# Altium PCB T19CAN20180910.PCBDoc
Units mm, origin at the board's own origin, x right, y up, seen from the top; angles counter-clockwise.
Board outline 92.61 x 66.21 mm, 18 copper layers (TopLayer, InternalPlane1, InternalPlane2, InternalPlane3, InternalPlane4, InternalPlane5, InternalPlane6, InternalPlane7, InternalPlane8, InternalPlane9, InternalPlane10, InternalPlane11, InternalPlane12, InternalPlane13, InternalPlane14, InternalPlane15, InternalPlane16, BottomLayer); 48 components, 496 nets, 294 pads, 40 vias.
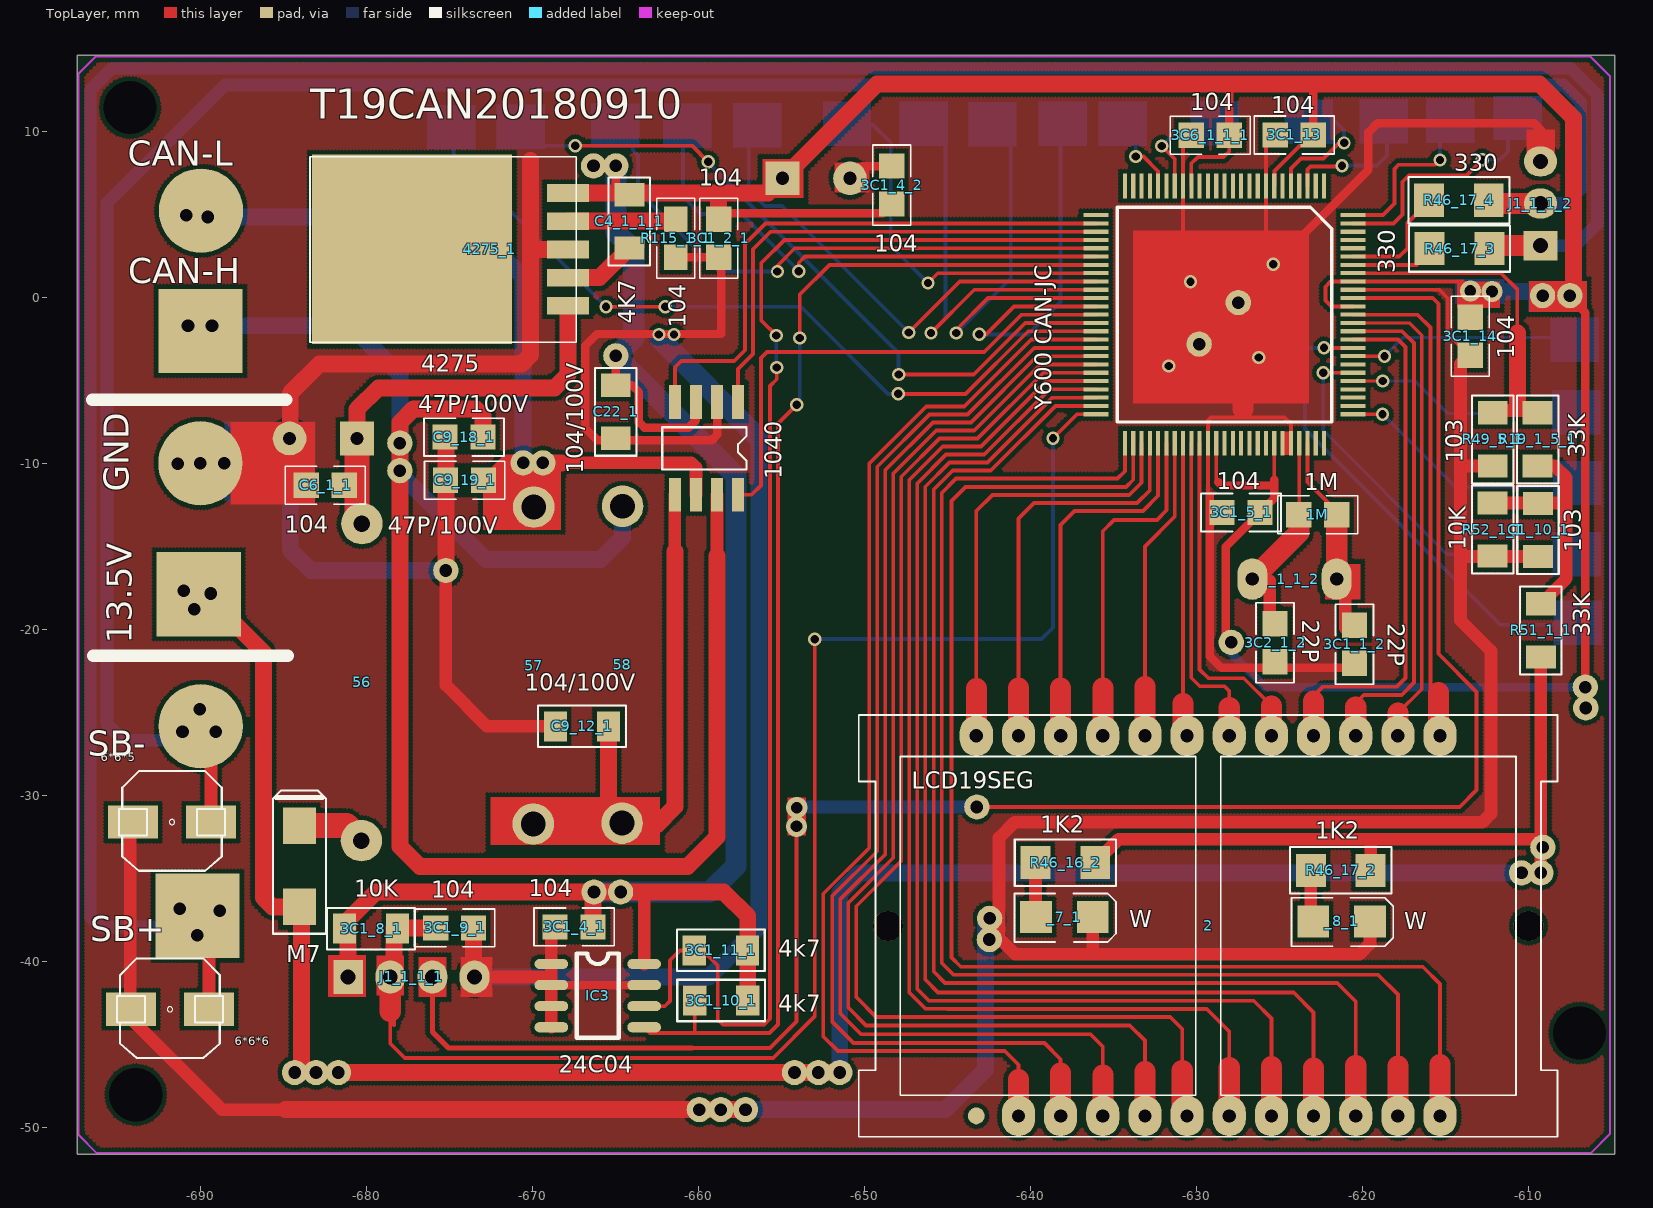
[diagram p0: TopLayer view]
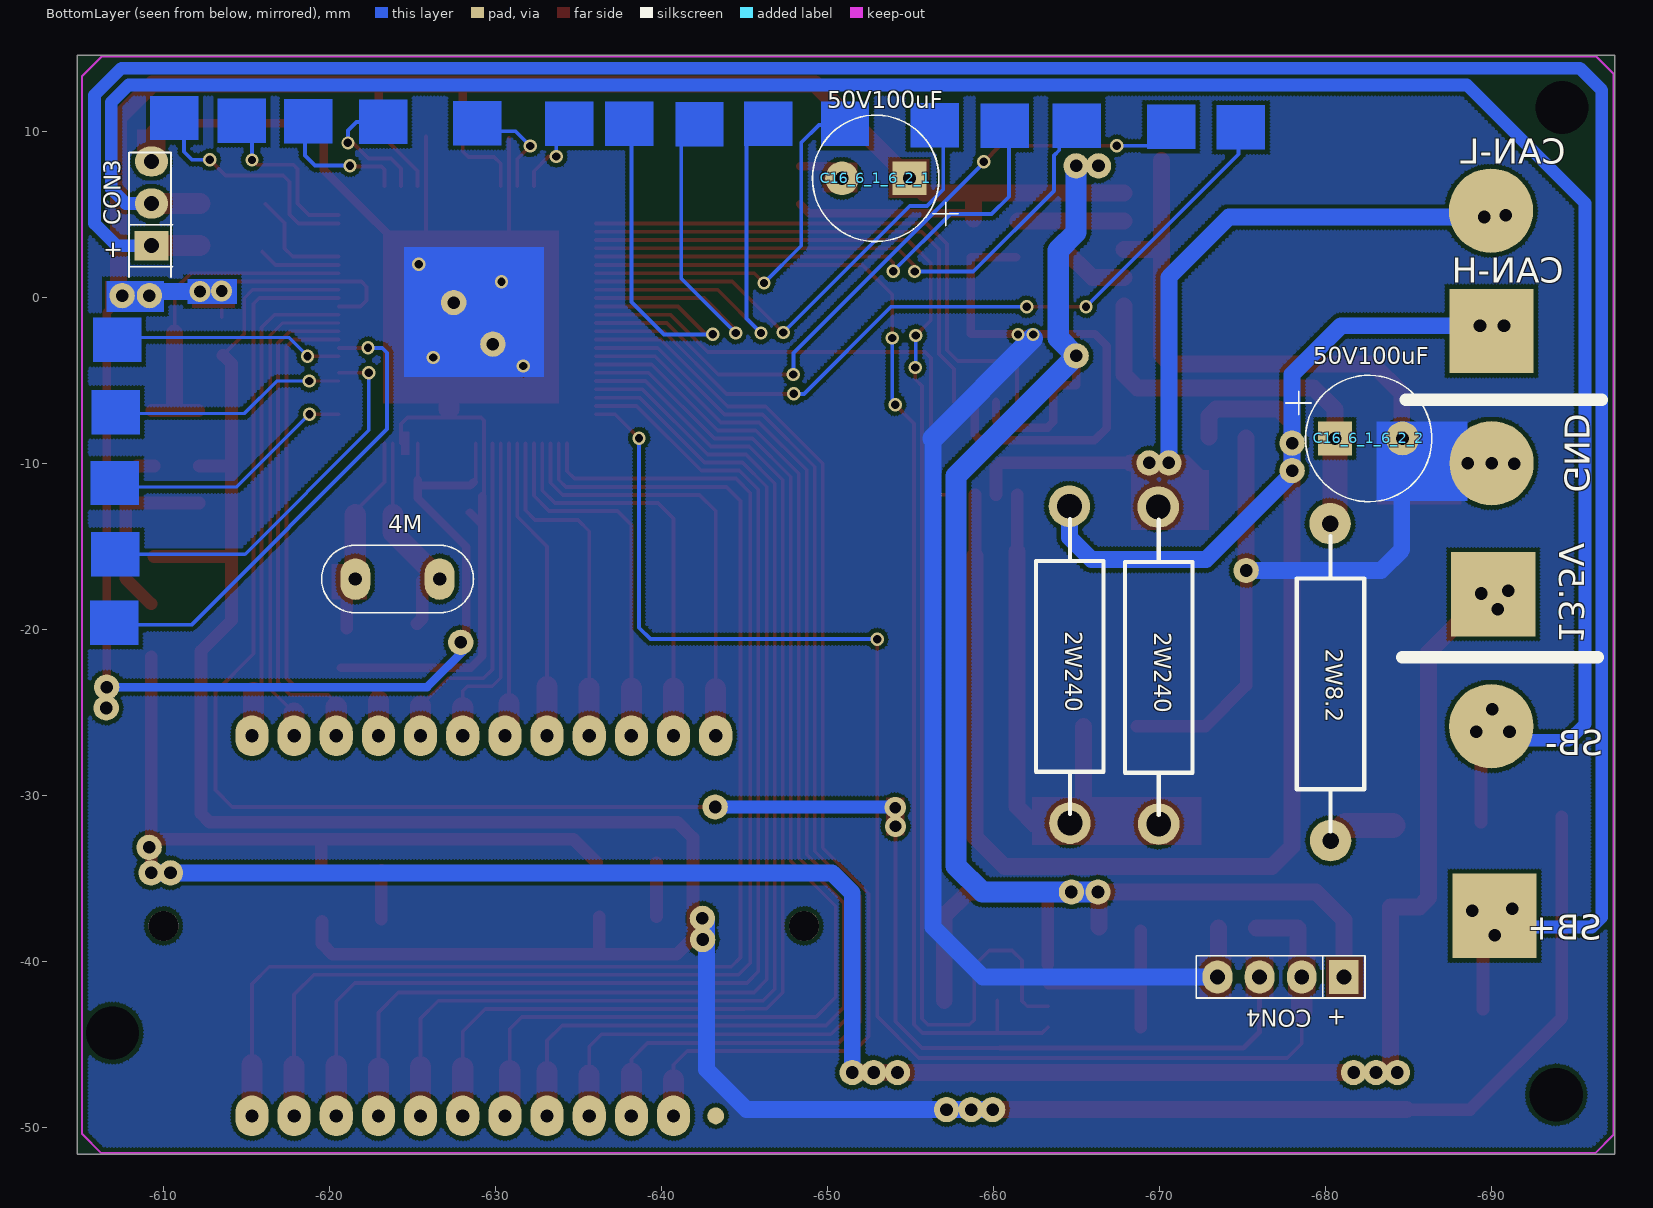
[diagram p1: BottomLayer view, seen from below]
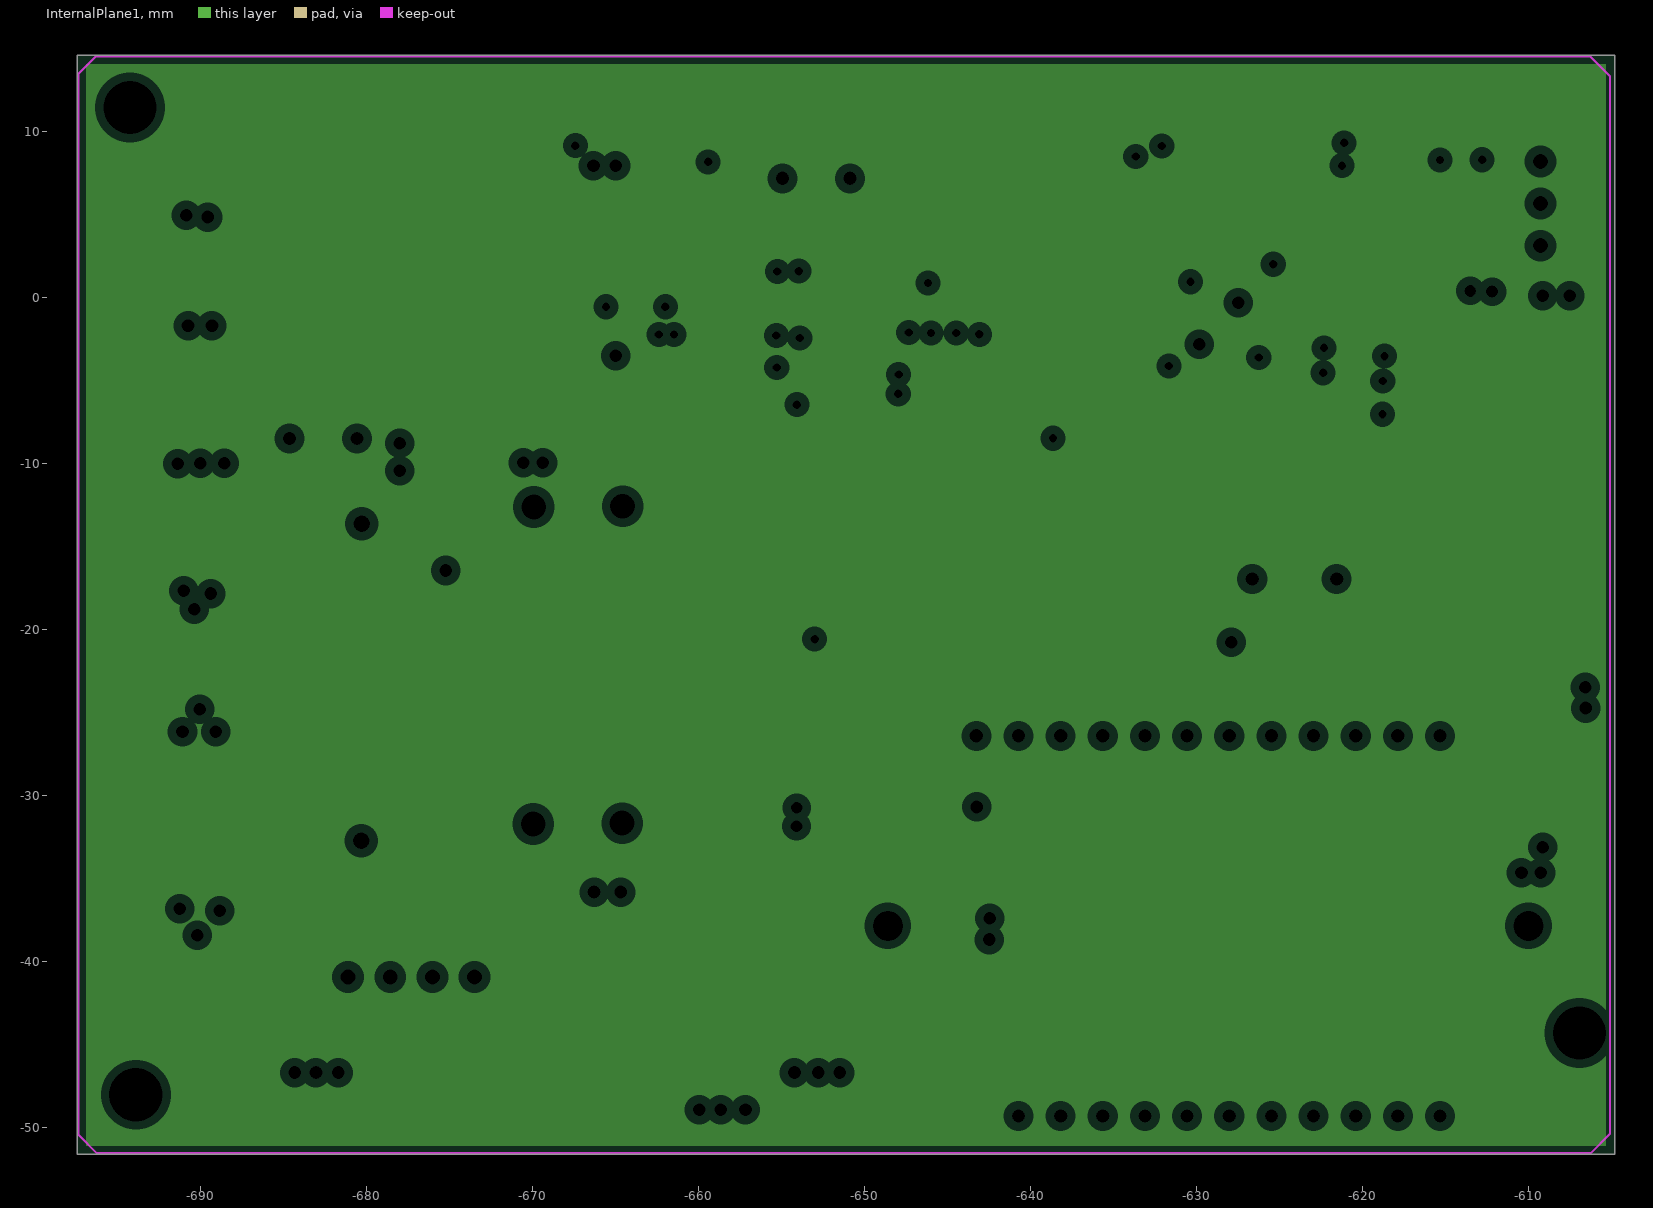
[diagram p2: InternalPlane1, clearances drawn from the general rule]
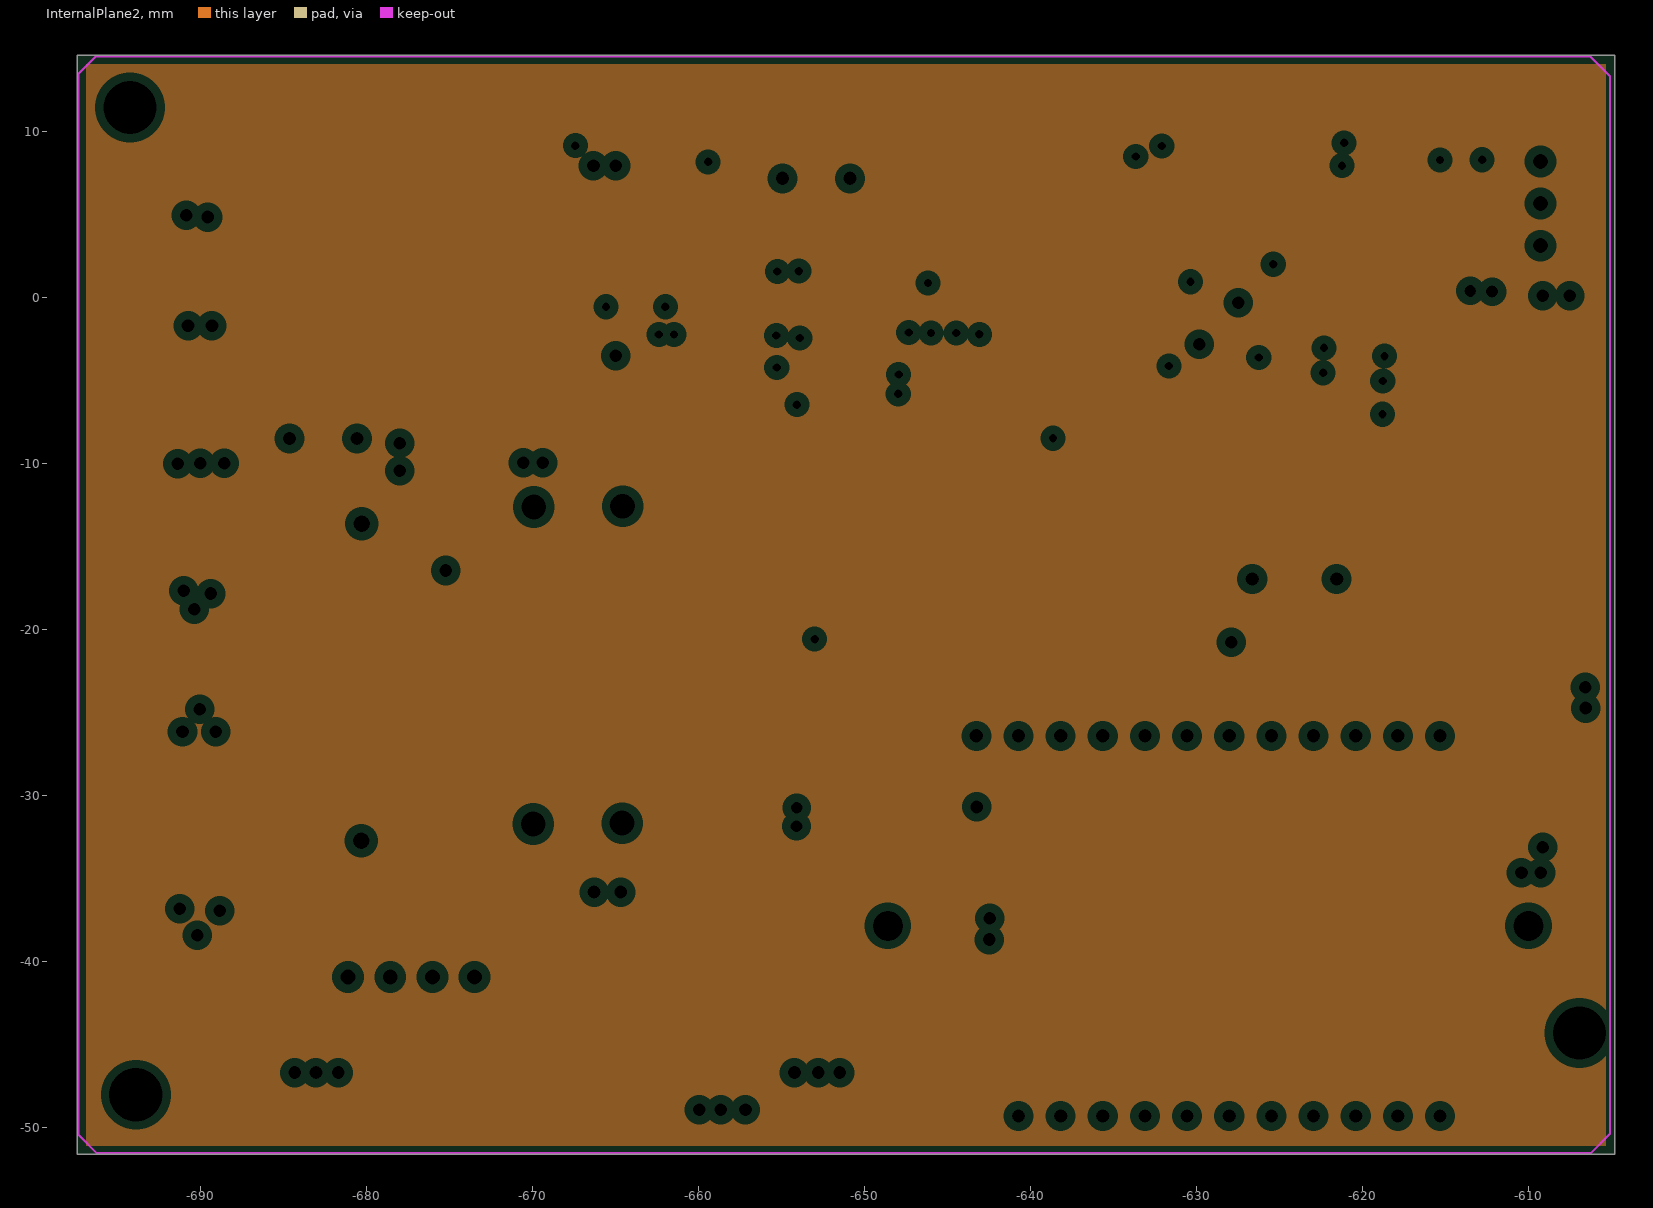
[diagram p3: InternalPlane2, clearances drawn from the general rule]
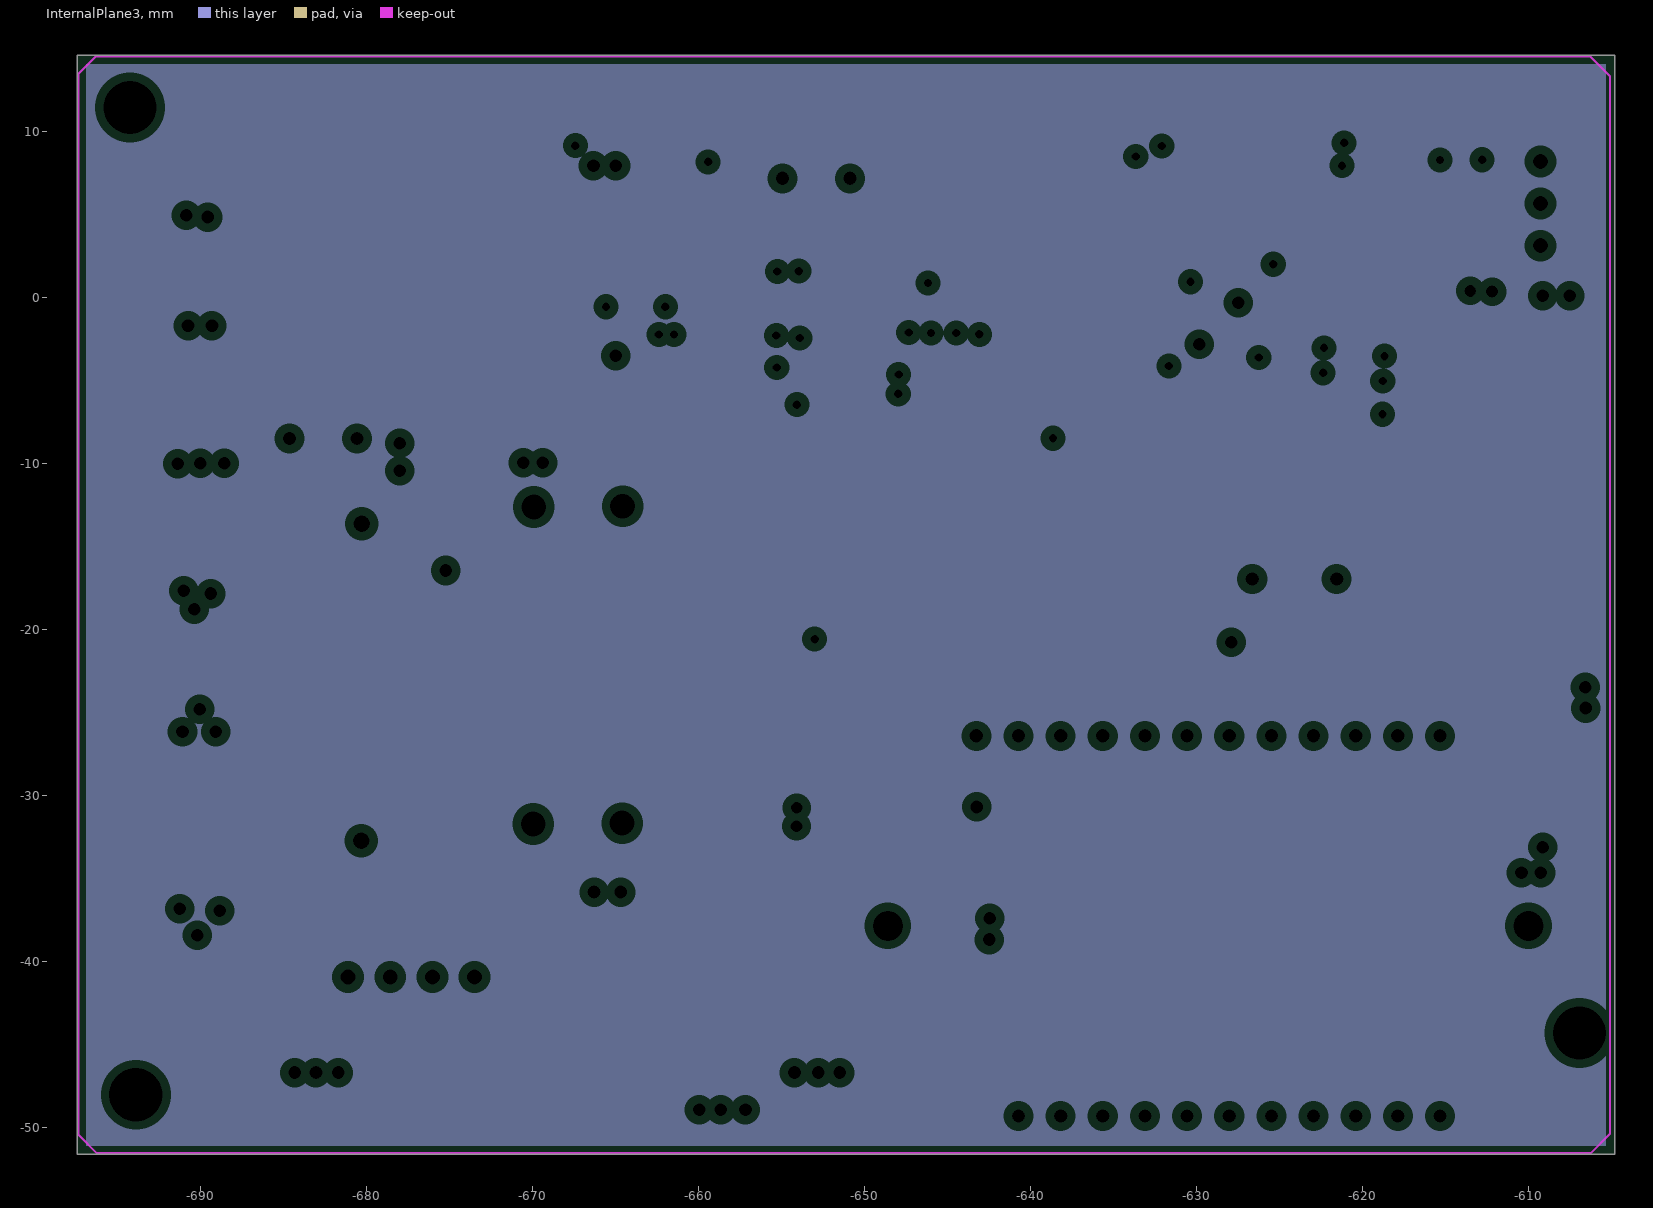
[diagram p4: InternalPlane3, clearances drawn from the general rule]
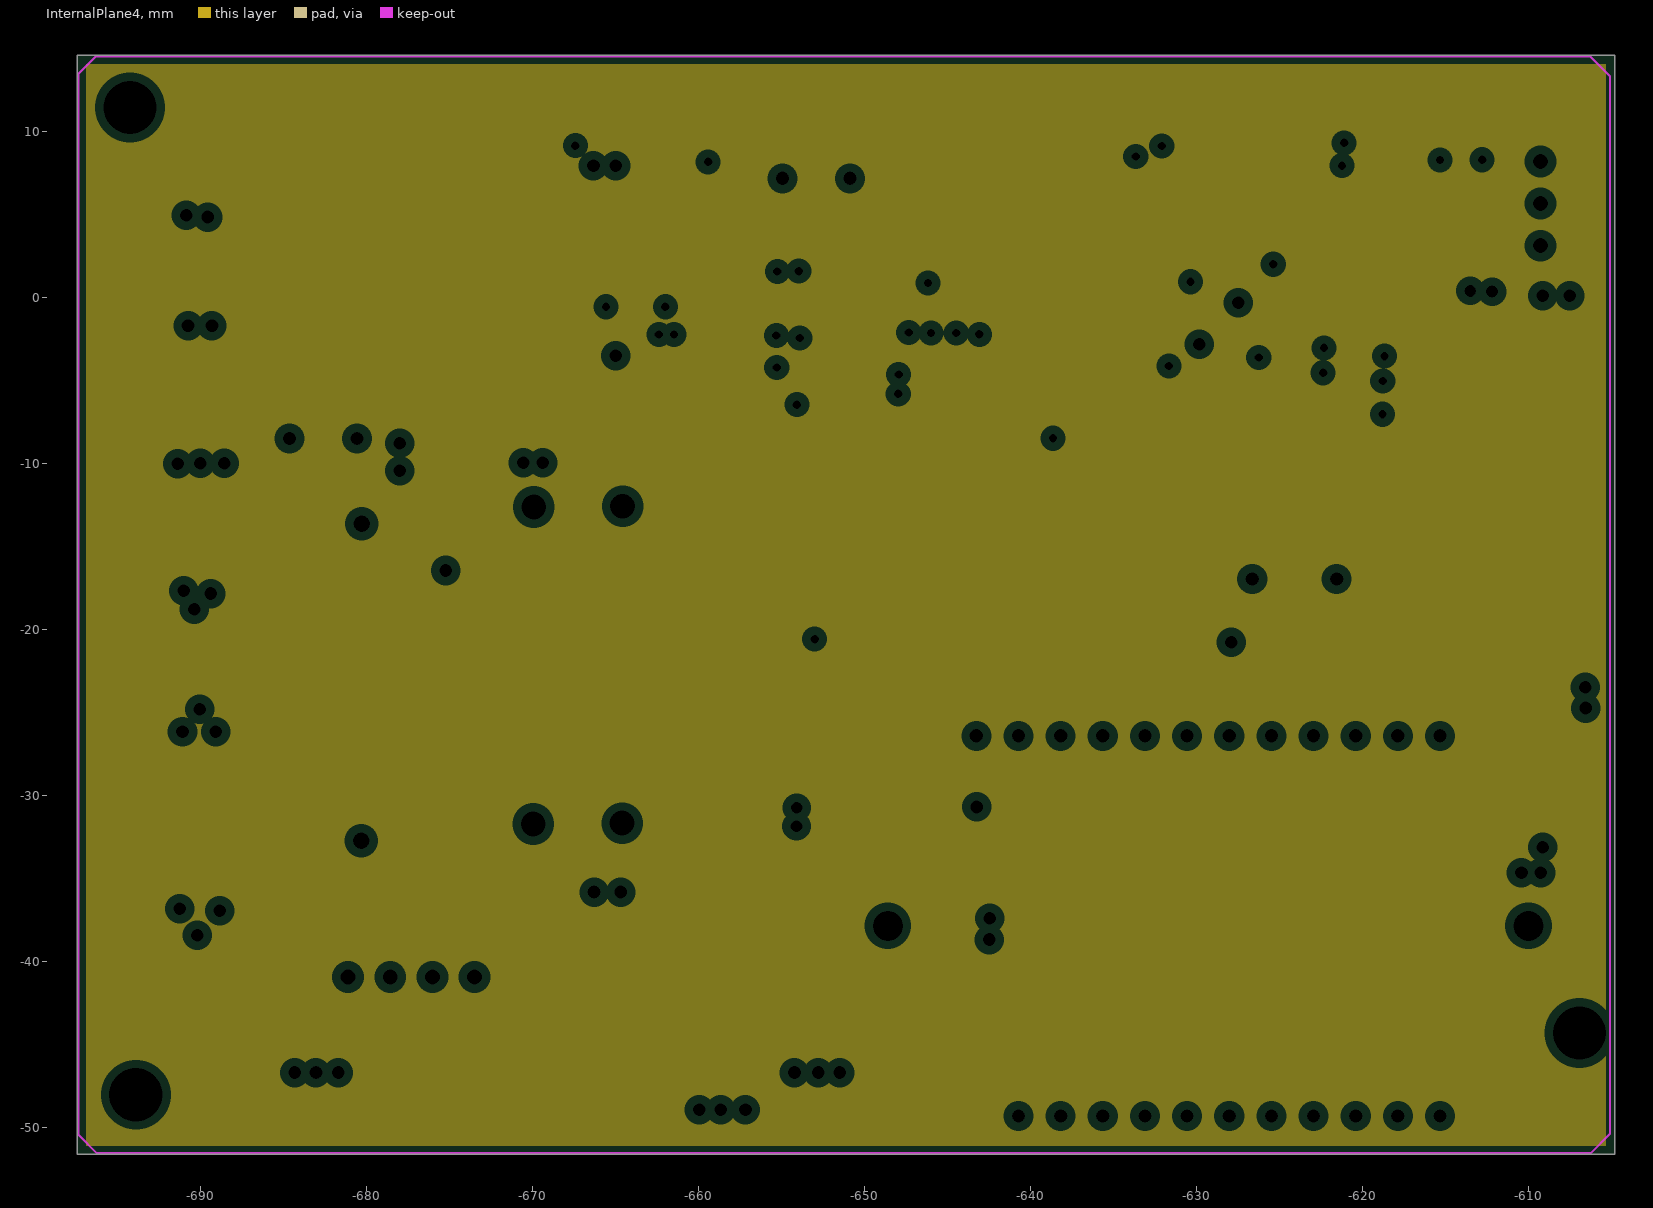
[diagram p5: InternalPlane4, clearances drawn from the general rule]
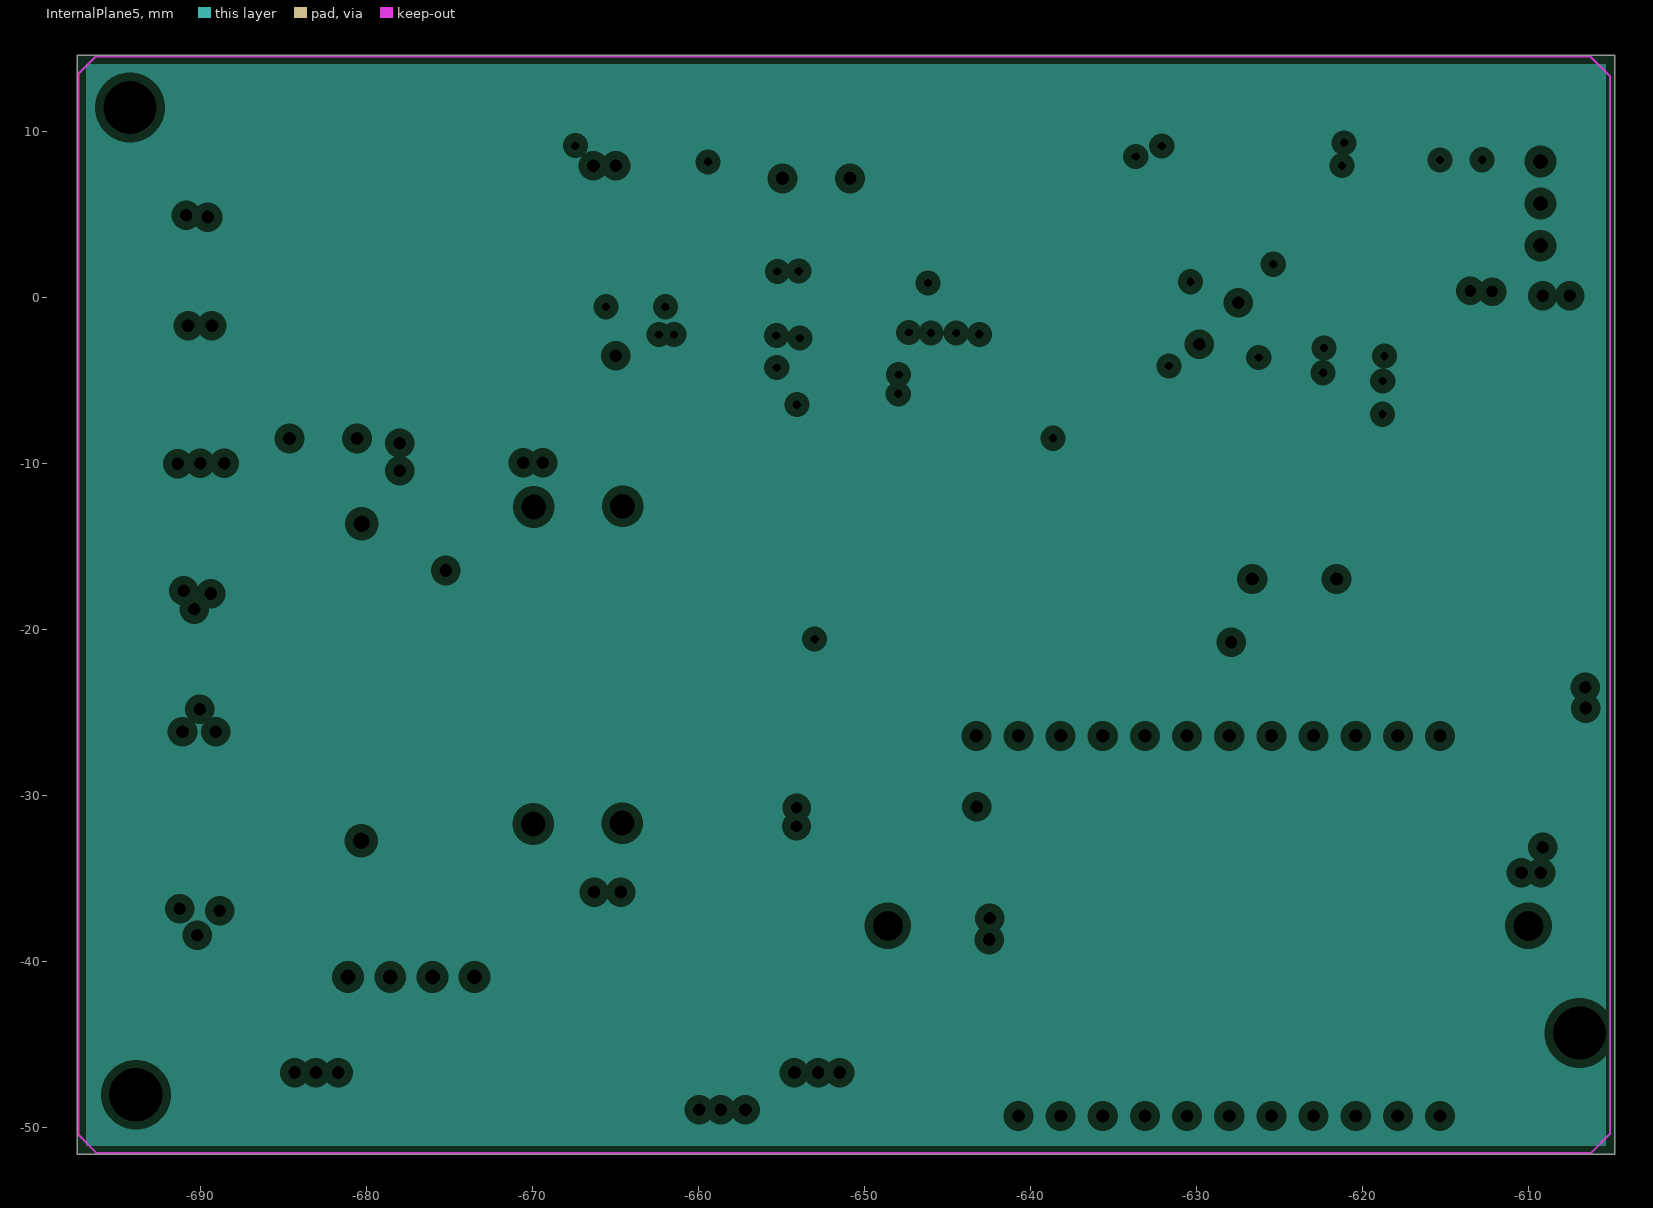
[diagram p6: InternalPlane5, clearances drawn from the general rule]
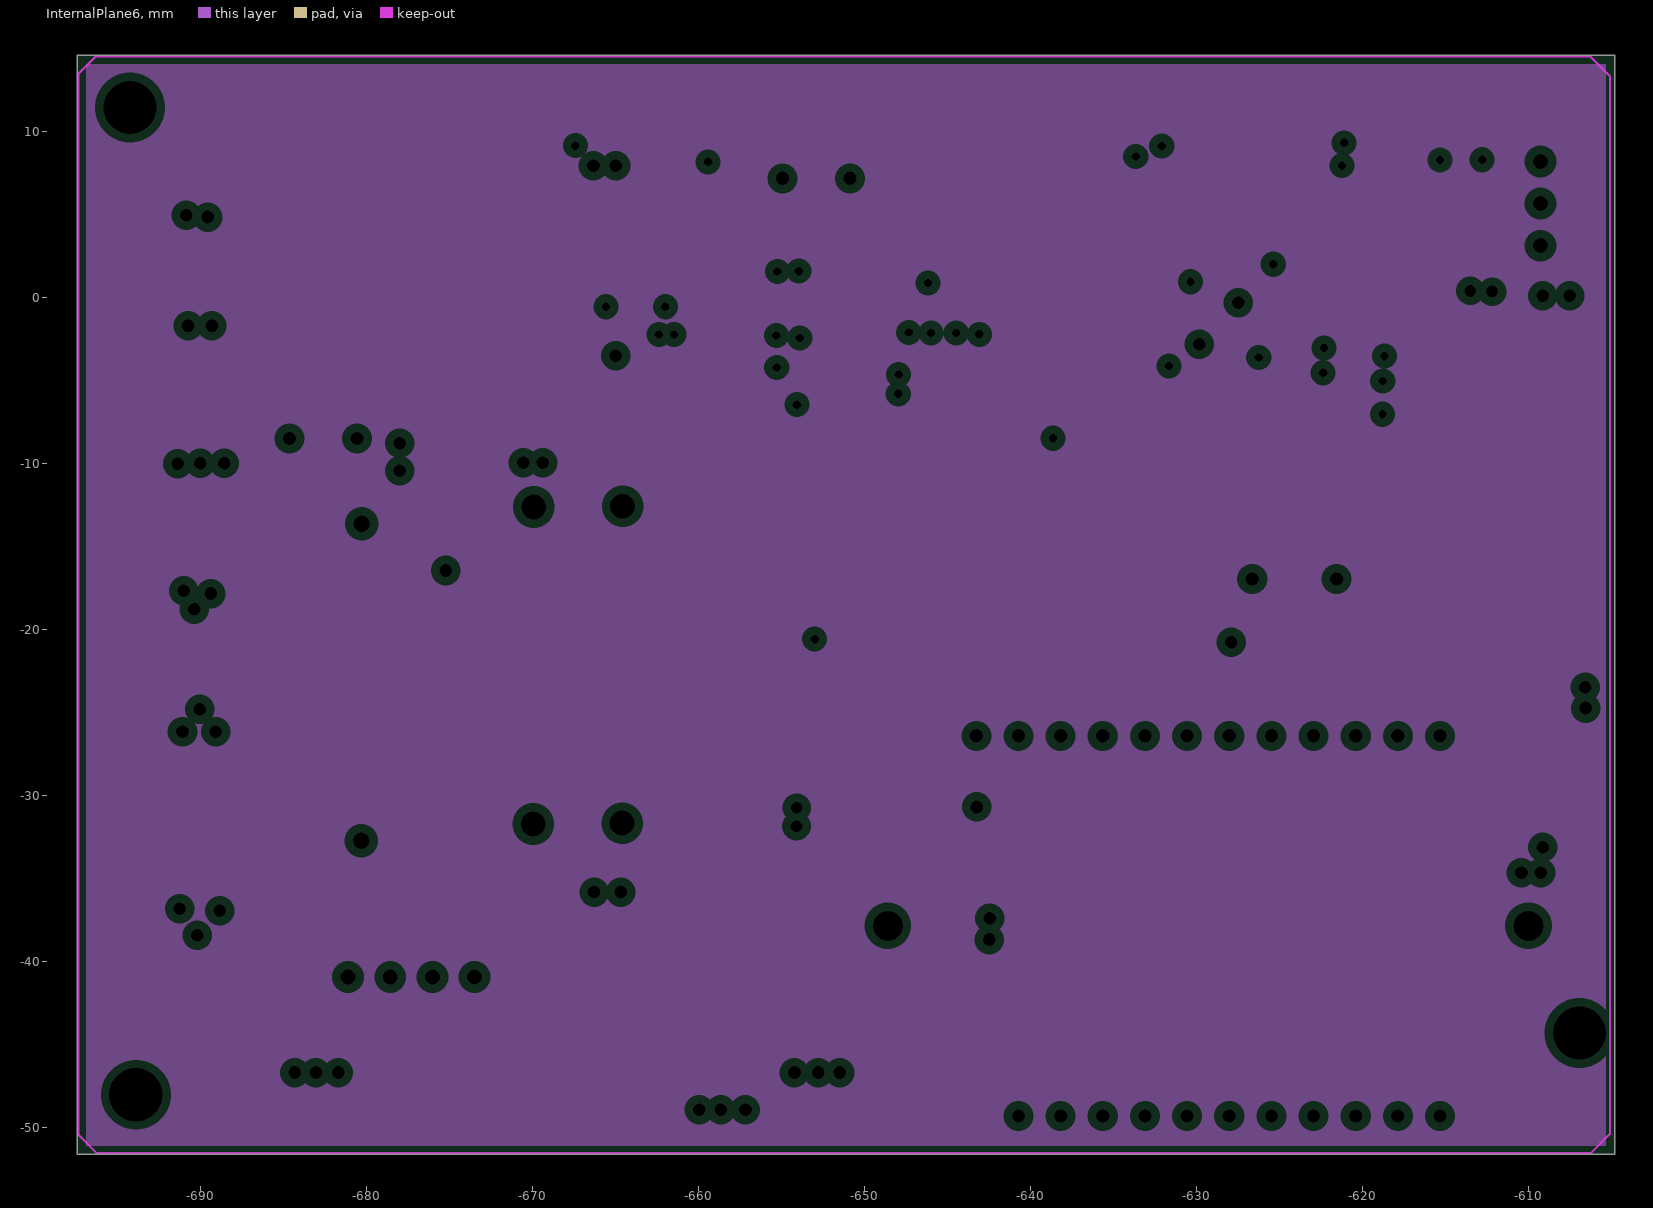
[diagram p7: InternalPlane6, clearances drawn from the general rule]
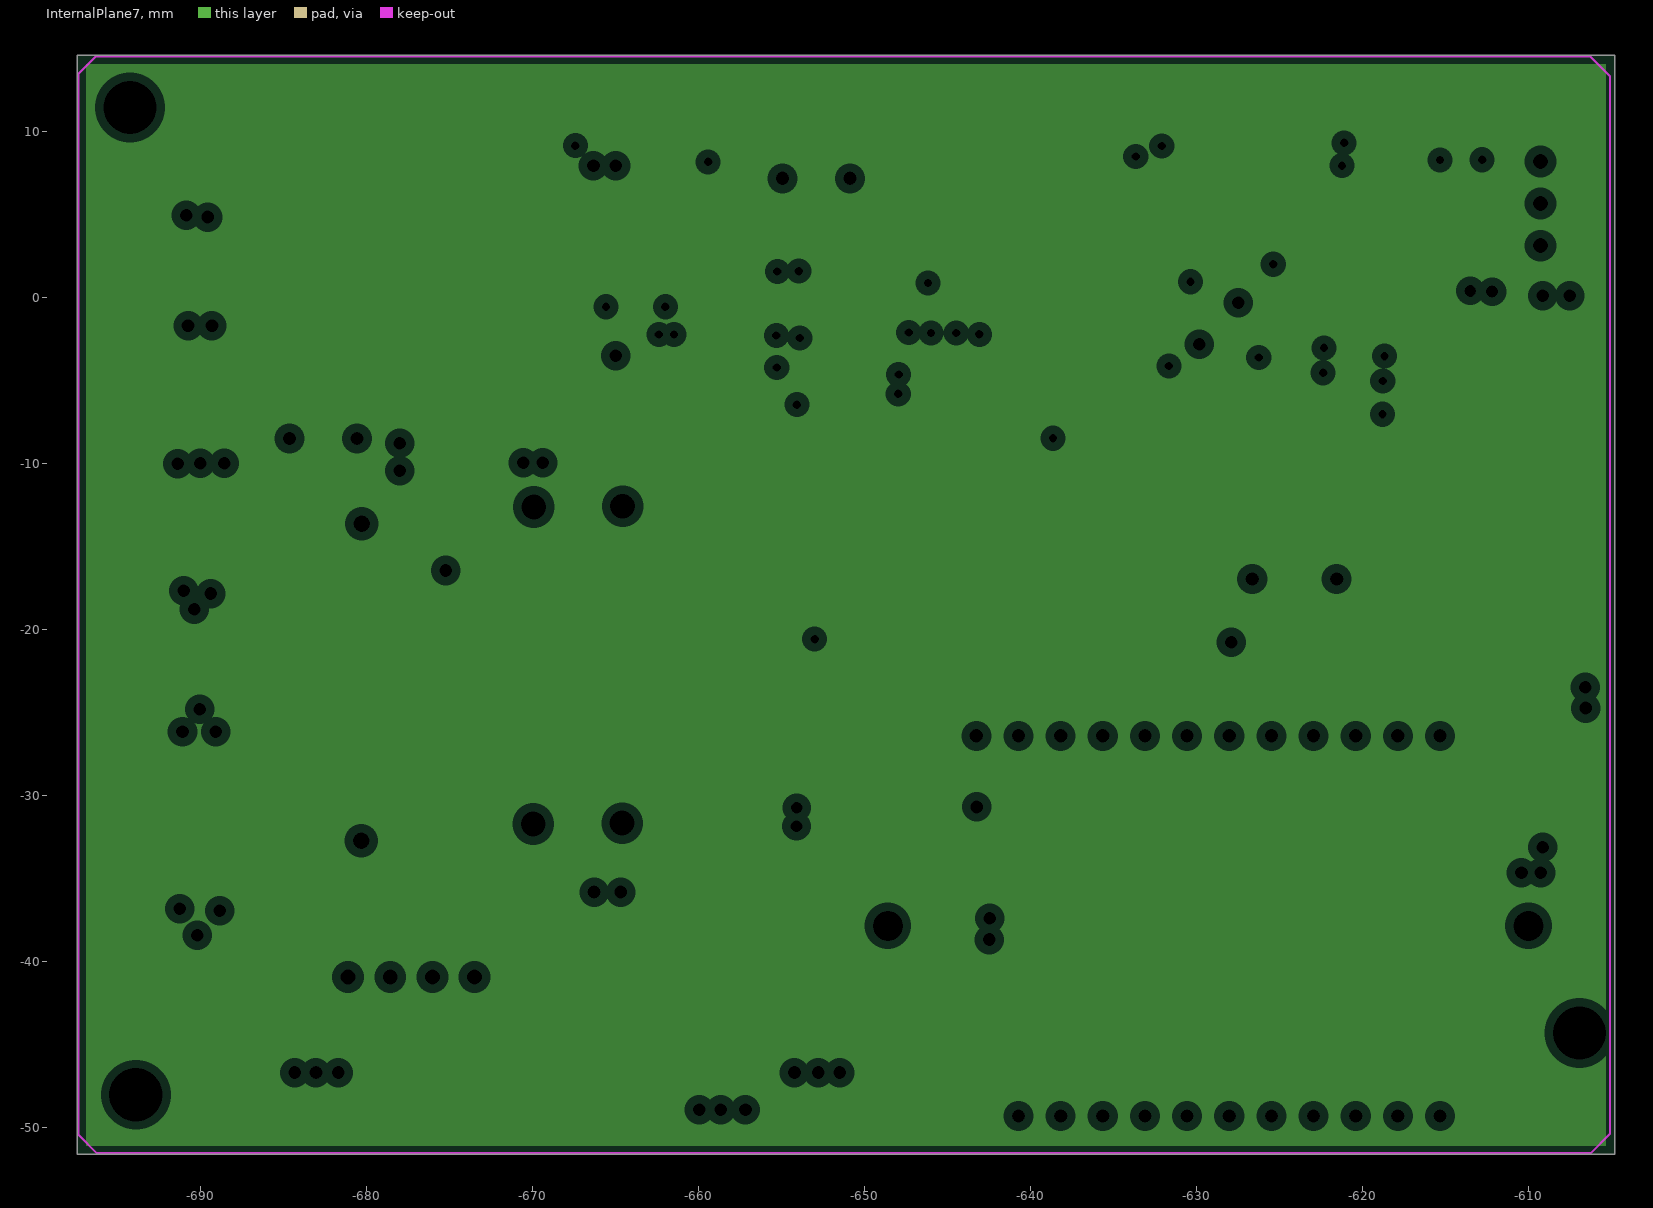
[diagram p8: InternalPlane7, clearances drawn from the general rule]
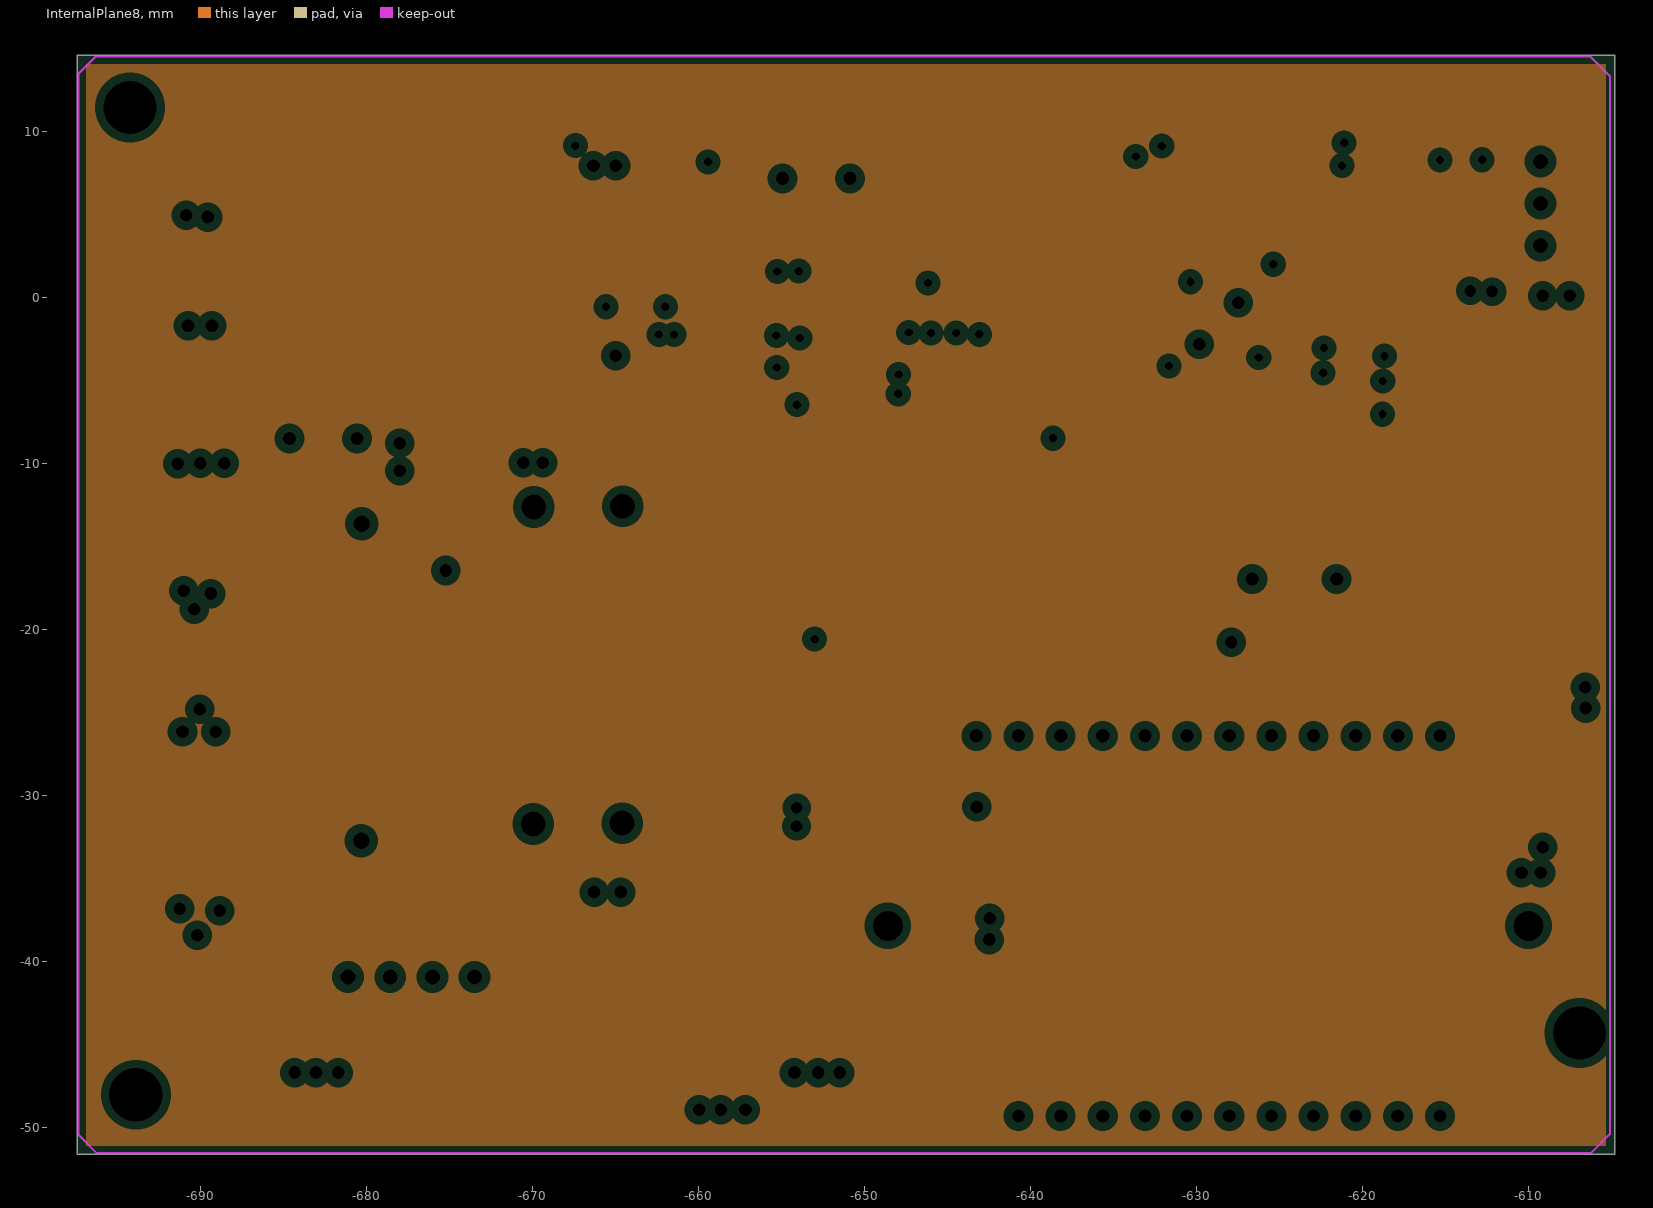
[diagram p9: InternalPlane8, clearances drawn from the general rule]
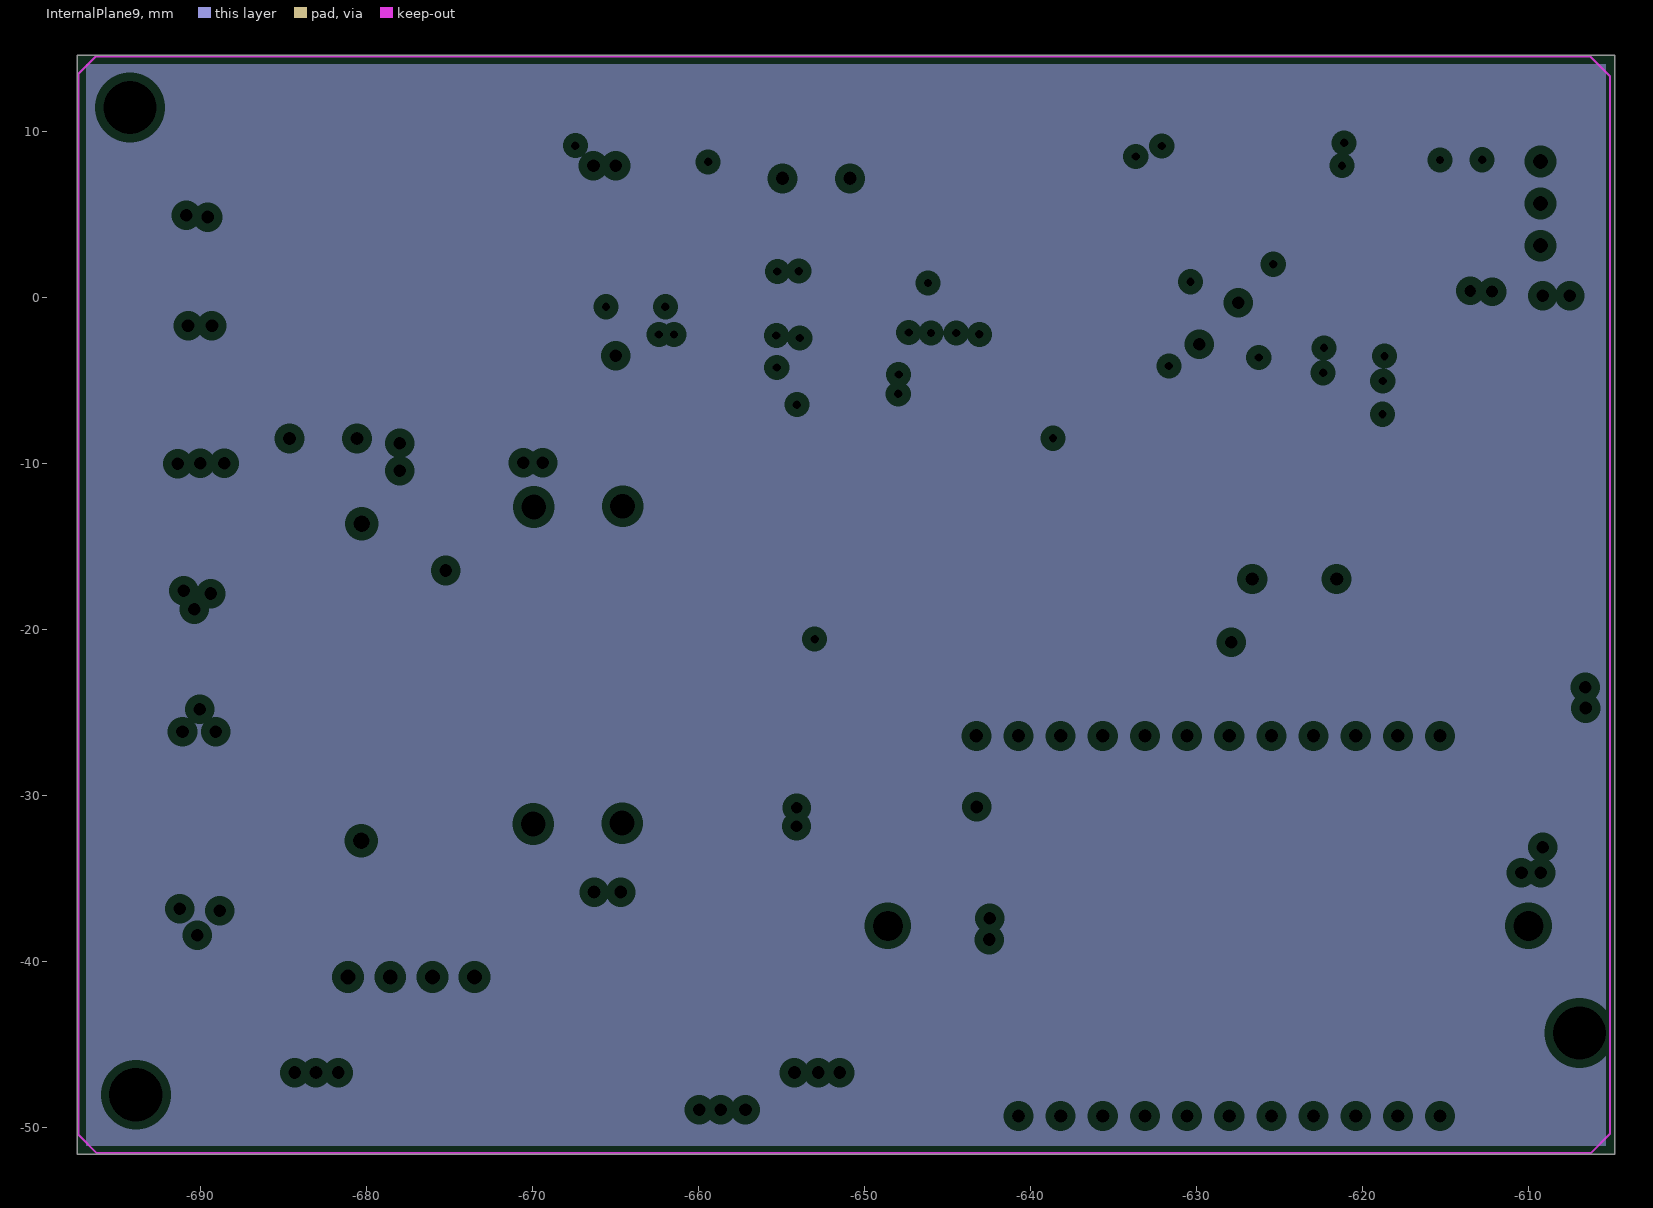
[diagram p10: InternalPlane9, clearances drawn from the general rule]
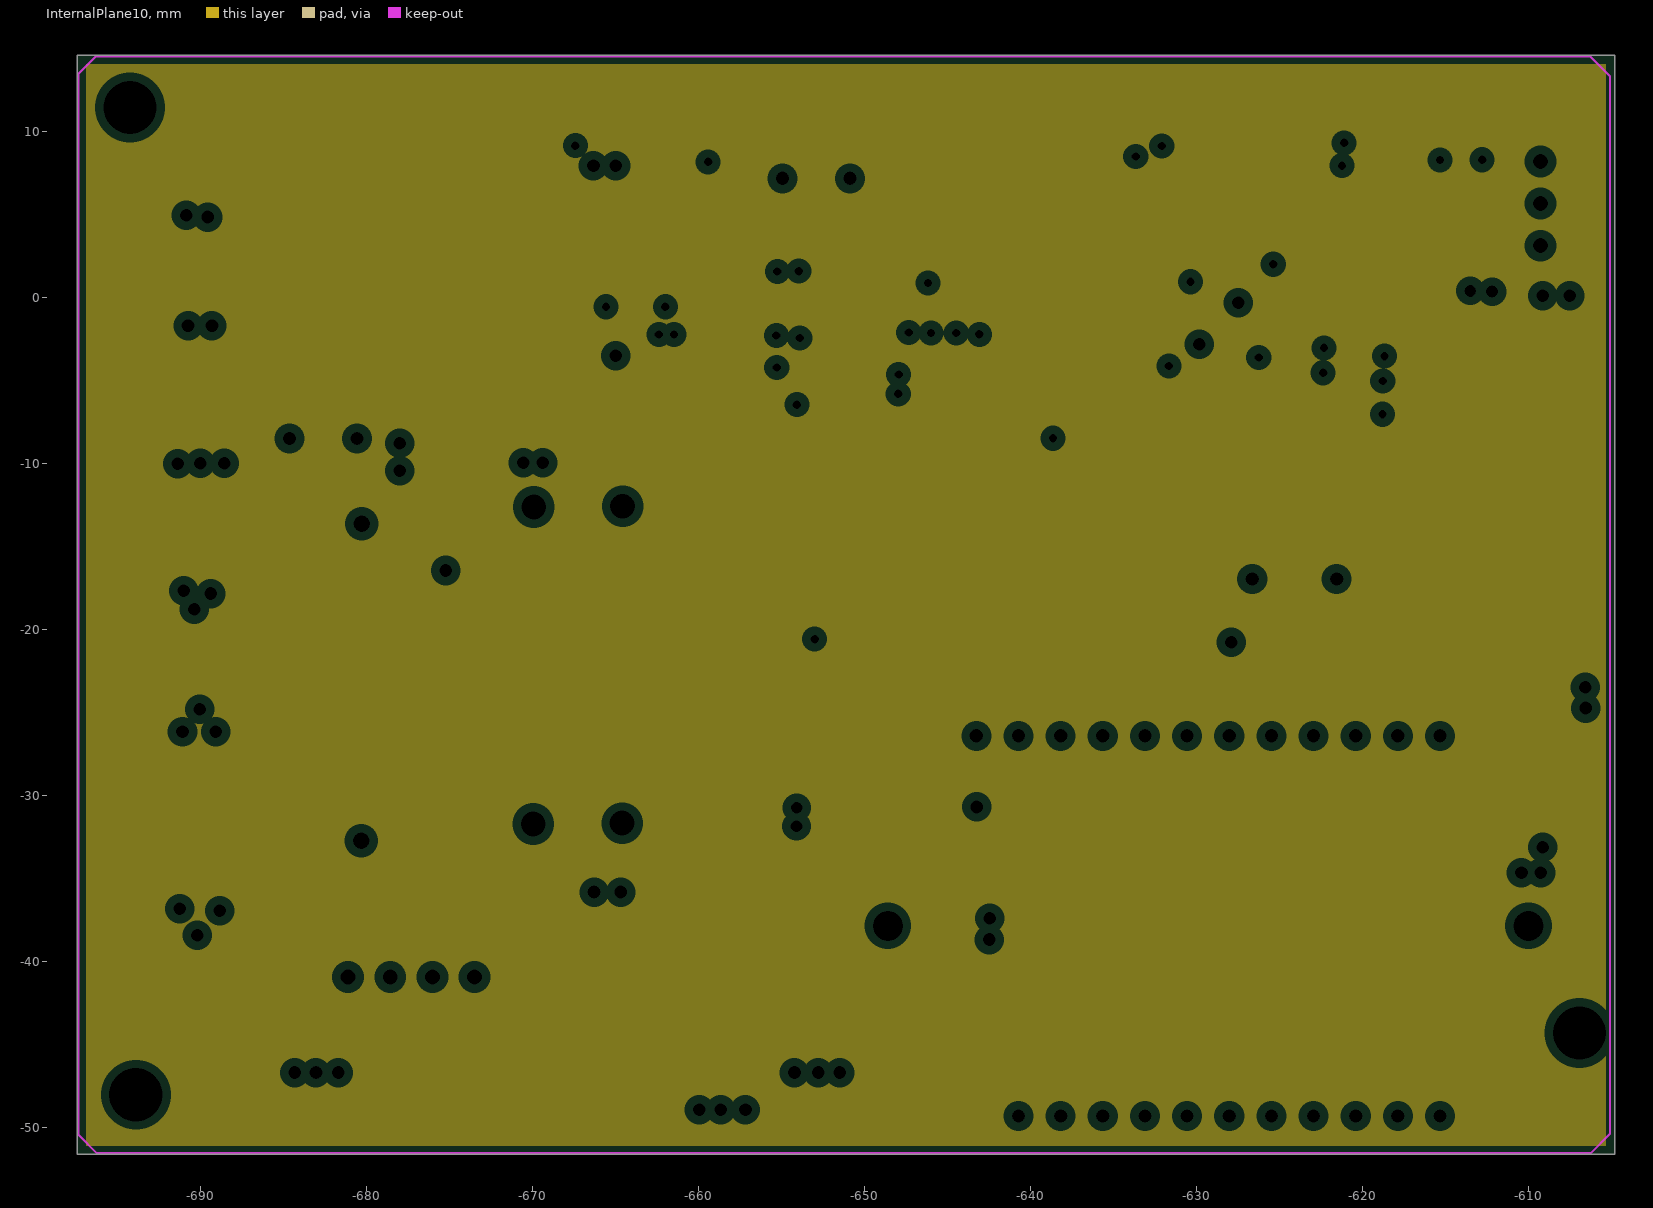
[diagram p11: InternalPlane10, clearances drawn from the general rule]
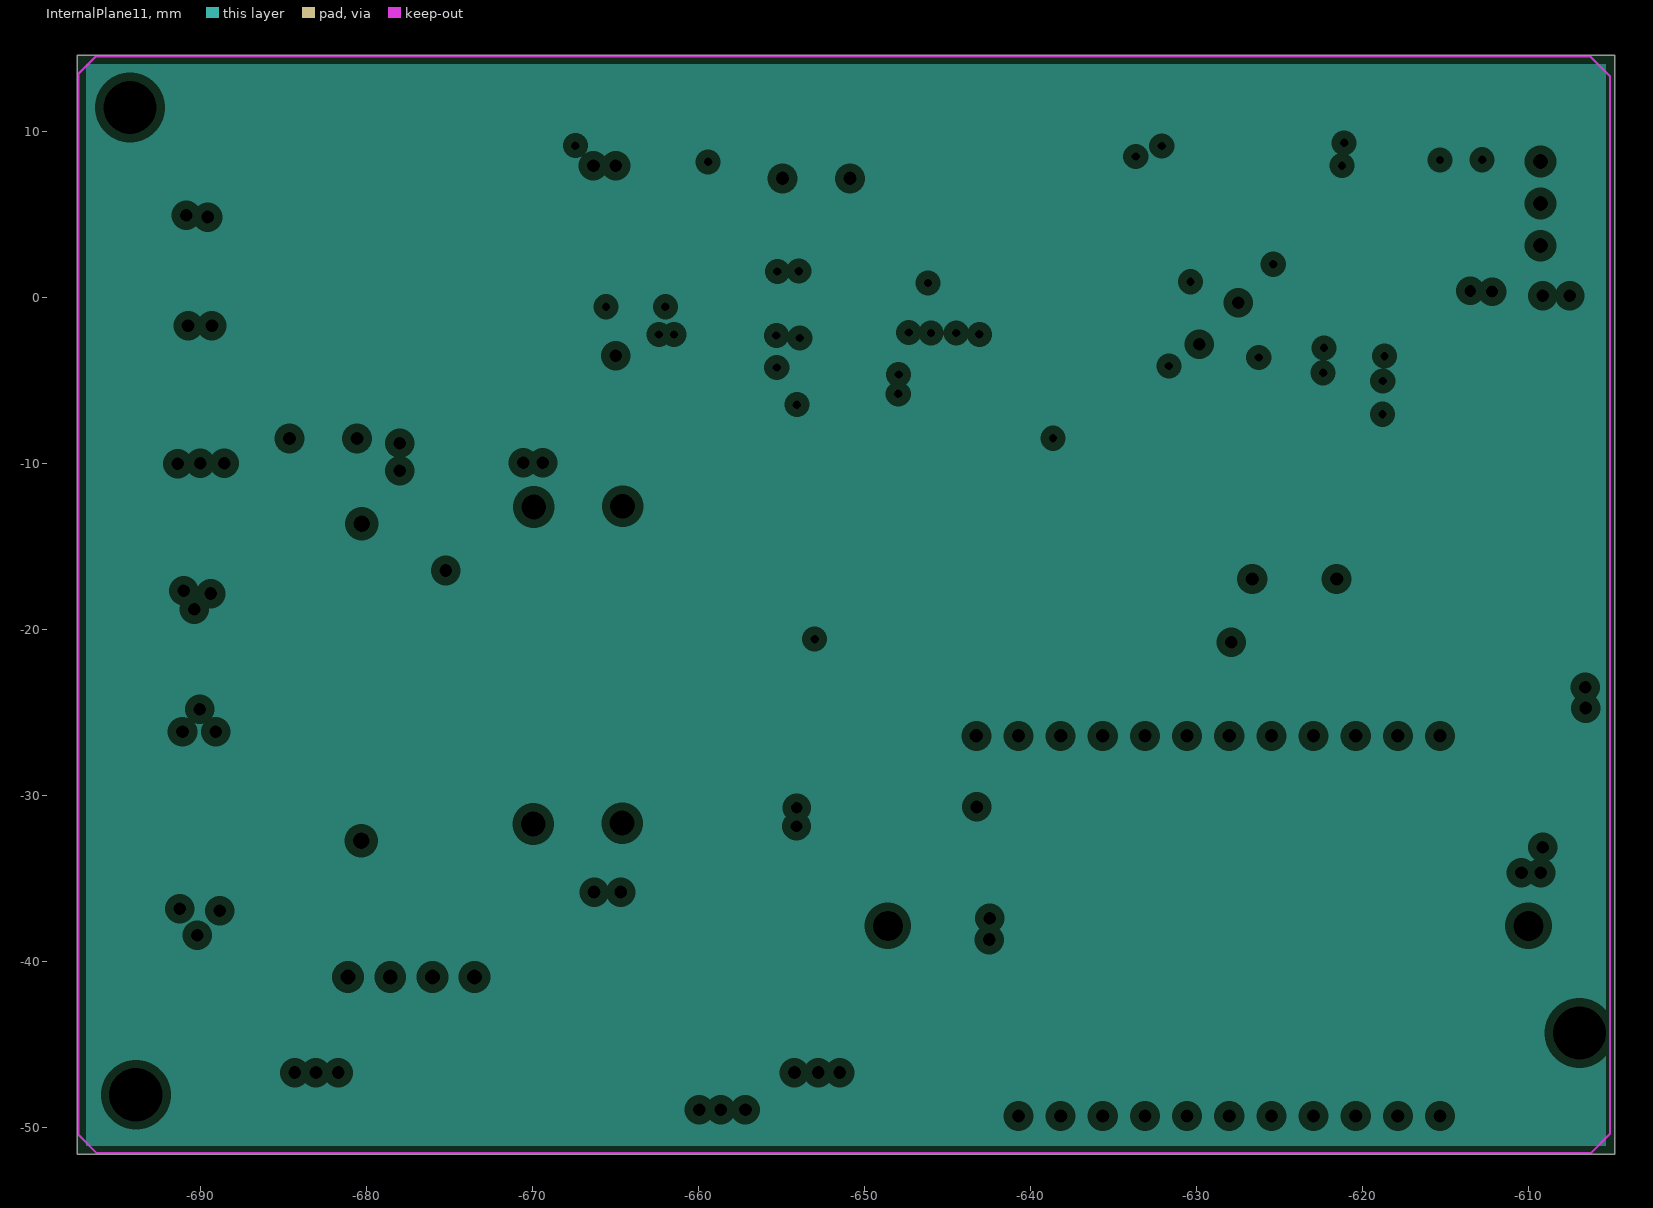
[diagram p12: InternalPlane11, clearances drawn from the general rule]
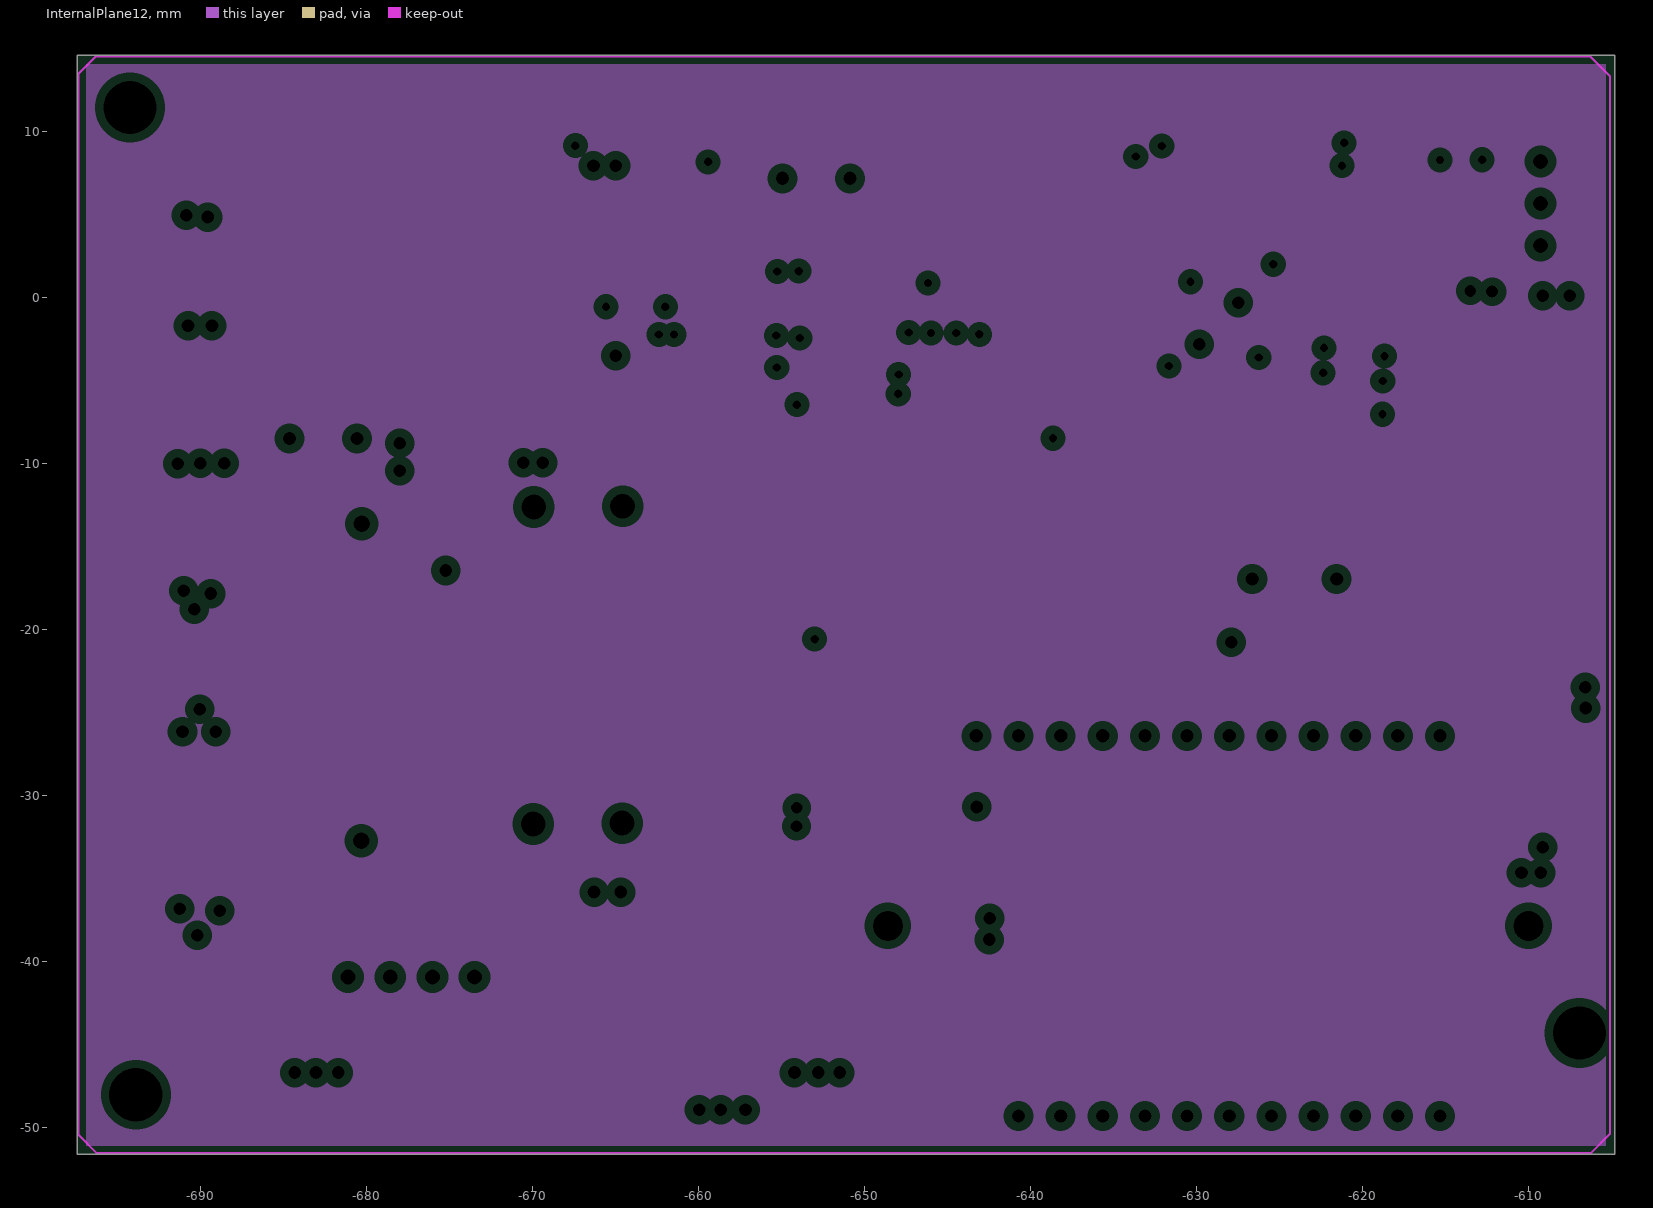
[diagram p13: InternalPlane12, clearances drawn from the general rule]
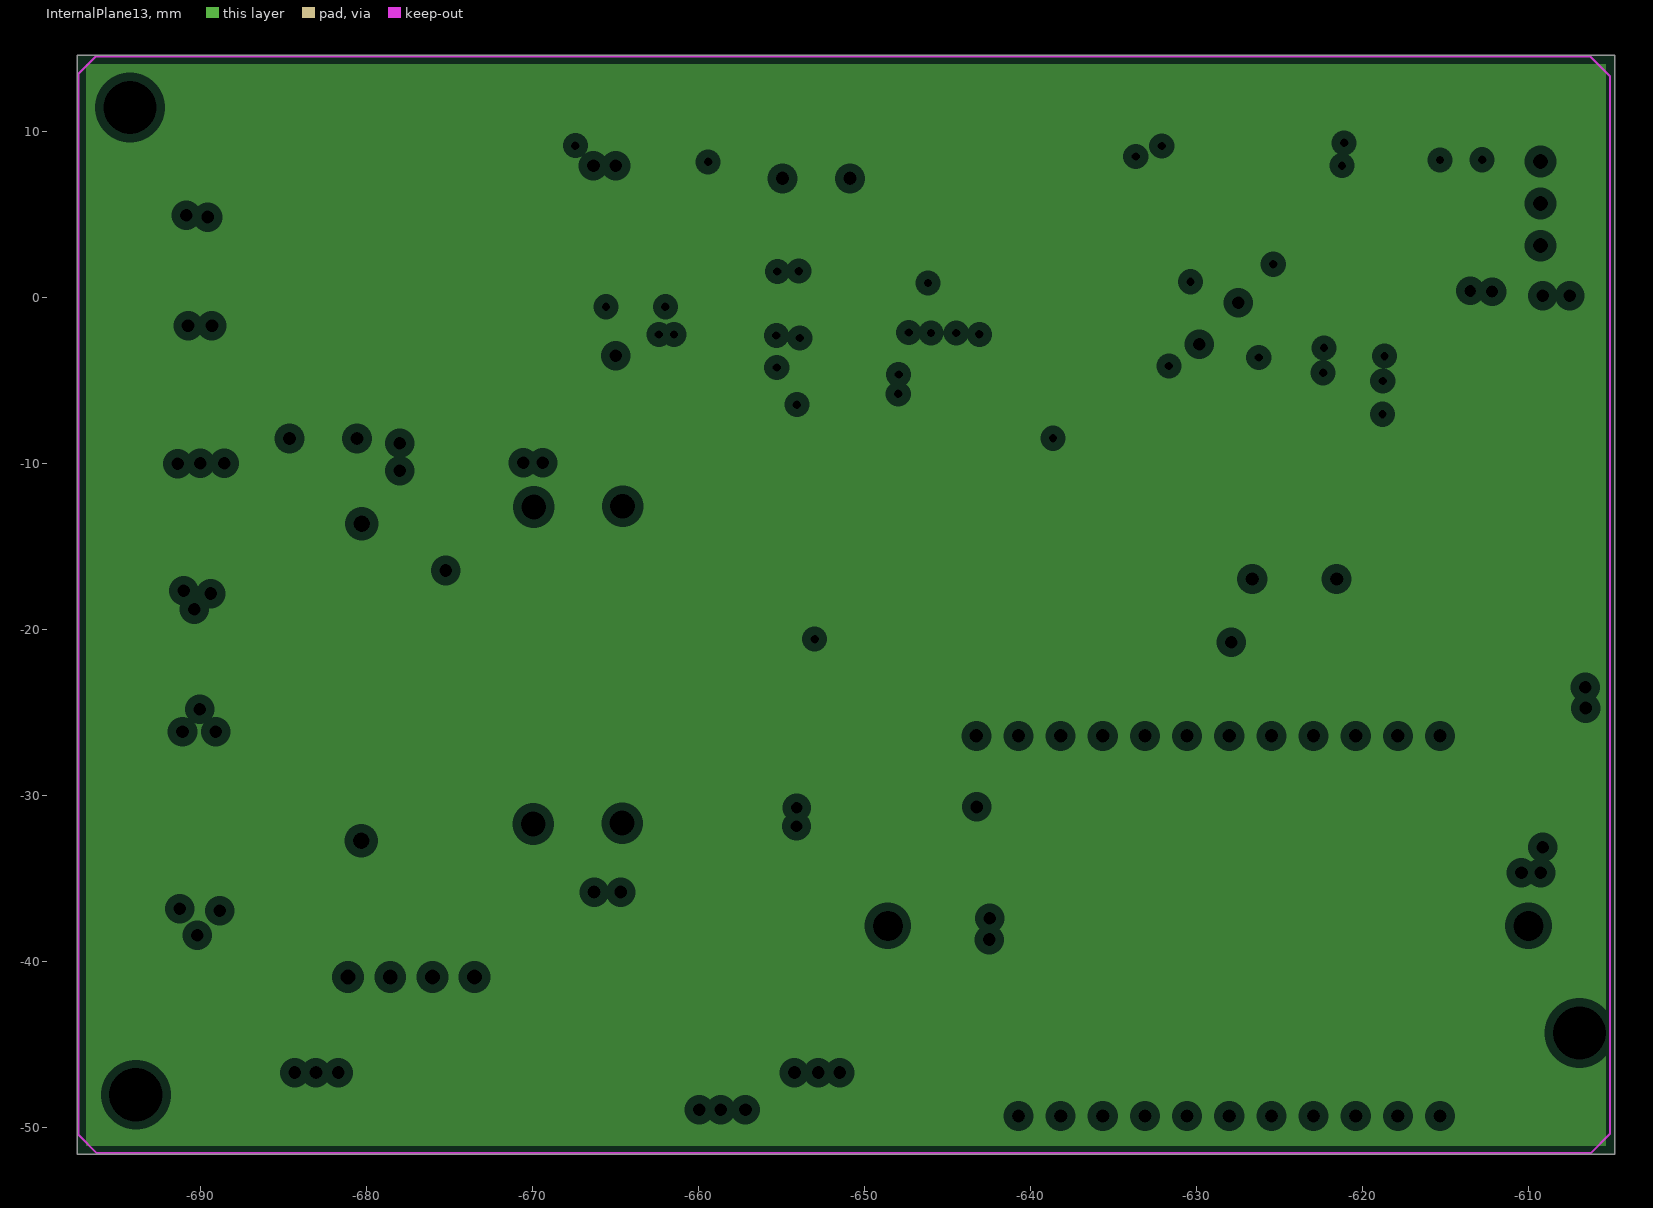
[diagram p14: InternalPlane13, clearances drawn from the general rule]
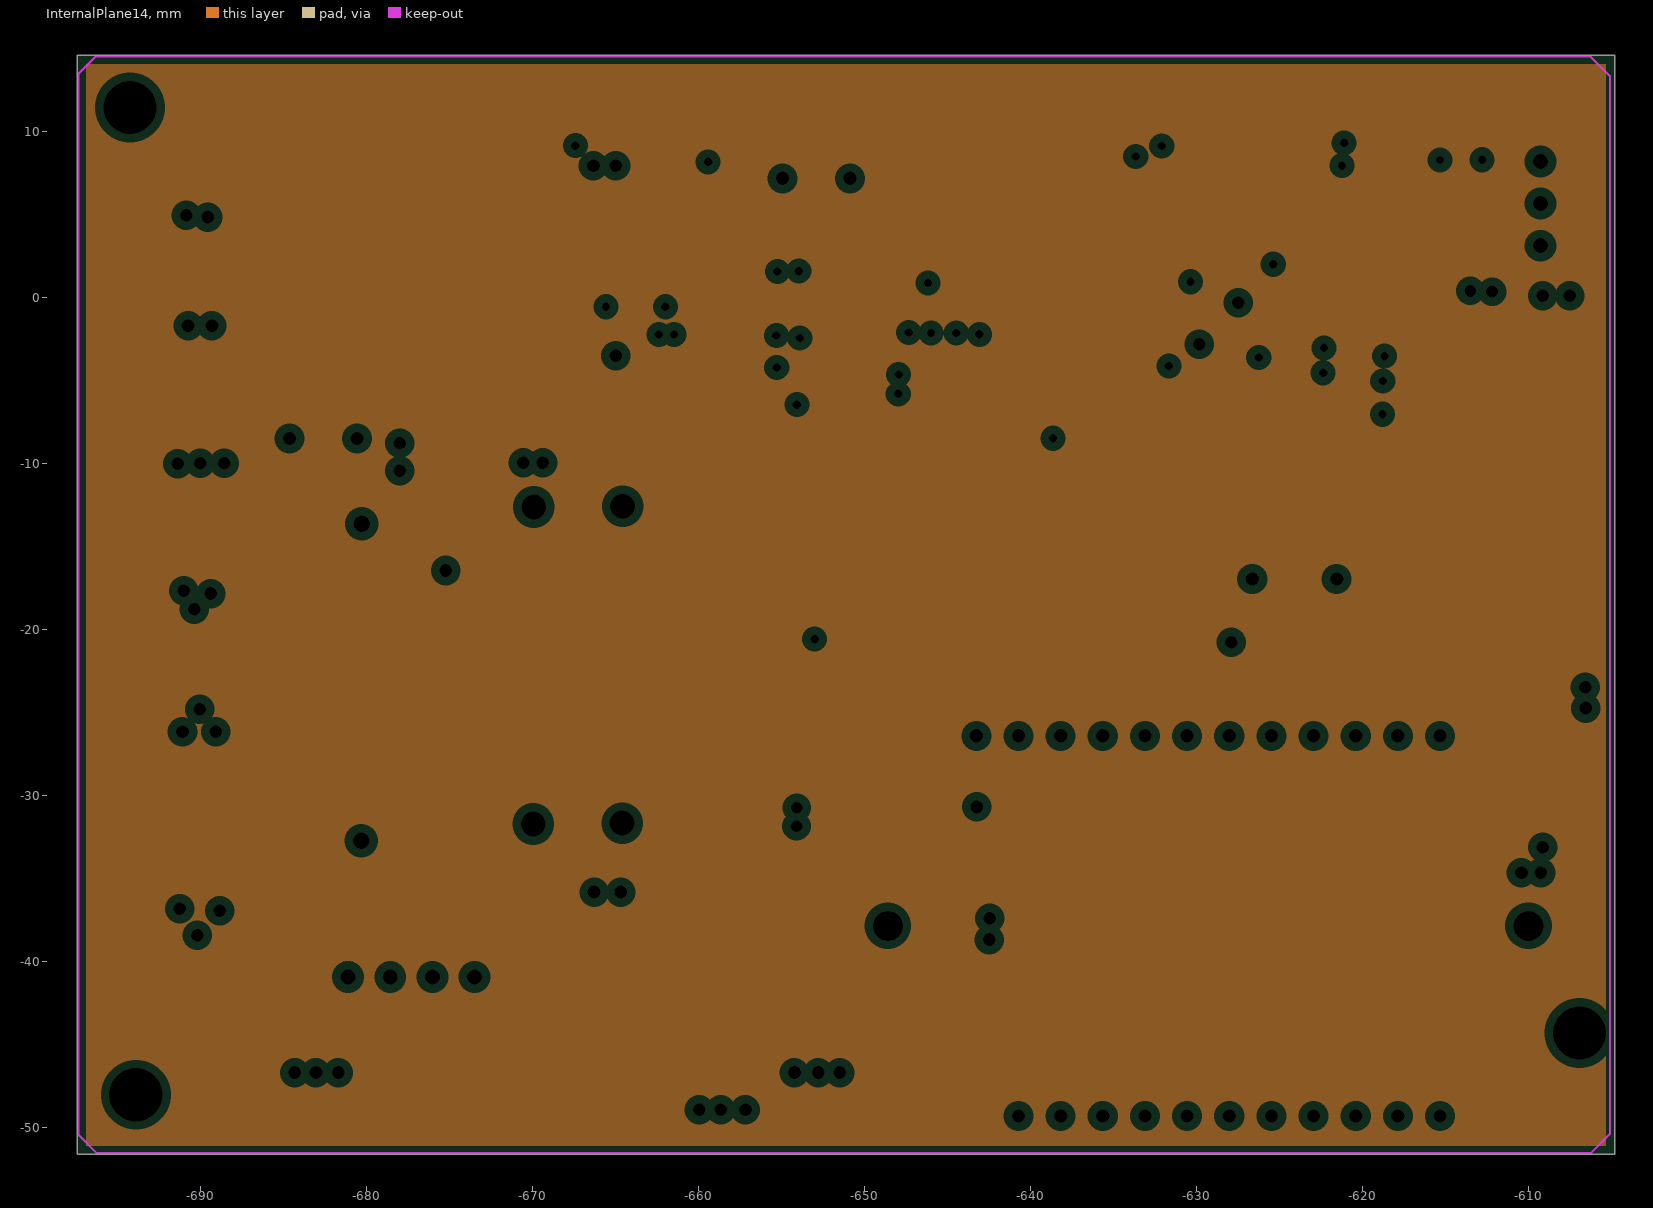
[diagram p15: InternalPlane14, clearances drawn from the general rule]

## Layer stack, top to bottom
TopSolder: solder mask 0.0102, Solder Resist, Dk 3.5
TopLayer: signal copper 0.0356
Dielectric1: dielectric 0.32, FR-4, Dk 4.8
InternalPlane1: plane copper 0.0356
Dielectric2: dielectric 0.32, FR-4, Dk 4.8
InternalPlane2: plane copper 0.0356
Dielectric3: dielectric 0.32, FR-4, Dk 4.8
InternalPlane3: plane copper 0.0356
Dielectric4: dielectric 0.32, FR-4, Dk 4.8
InternalPlane4: plane copper 0.0356
Dielectric5: dielectric 0.32, FR-4, Dk 4.8
InternalPlane5: plane copper 0.0356
Dielectric6: dielectric 0.32, FR-4, Dk 4.8
InternalPlane6: plane copper 0.0356
Dielectric7: dielectric 0.32, FR-4, Dk 4.8
InternalPlane7: plane copper 0.0356
Dielectric8: dielectric 0.32, FR-4, Dk 4.8
InternalPlane8: plane copper 0.0356
Dielectric9: dielectric 0.32, FR-4, Dk 4.8
InternalPlane9: plane copper 0.0356
Dielectric10: dielectric 0.32, FR-4, Dk 4.8
InternalPlane10: plane copper 0.0356
Dielectric11: dielectric 0.32, FR-4, Dk 4.8
InternalPlane11: plane copper 0.0356
Dielectric12: dielectric 0.32, FR-4, Dk 4.8
InternalPlane12: plane copper 0.0356
Dielectric13: dielectric 0.32, FR-4, Dk 4.8
InternalPlane13: plane copper 0.0356
Dielectric14: dielectric 0.32, FR-4, Dk 4.8
InternalPlane14: plane copper 0.0356
Dielectric15: dielectric 0.32, FR-4, Dk 4.8
InternalPlane15: plane copper 0.0356
Dielectric16: dielectric 0.32, FR-4, Dk 4.8
InternalPlane16: plane copper 0.0356
Dielectric17: dielectric 0.32, FR-4, Dk 4.8
BottomLayer: signal copper 0.0356
BottomSolder: solder mask 0.0102, Solder Resist, Dk 3.5

## Board outline
-697.413,-51.608 -604.802,-51.608 -604.802,14.597 -697.413,14.597

## Design rules (kind name [scope] priority, off if disabled: settings)
Clearance 清除..... [(InPoly)] p1 off: gap=1.27
Clearance [All] p2: gap=0.254
ComponentClearance [All] p1 off: gap=0.254 collisioncheckmode=3 verticalgap=0.254 showdistances=FALSE
FabricationTestPointUsage TestPointUsage [All] p1: valid=0 allowmultiple=FALSE
FabricationTestpoint Testpoint [All] p1: side=3 testpointundercomponent=TRUE minsize=1.016 maxsize=2.54 preferedsize=1.524 minholesize=0.508 maxholesize=1.016 preferedholesize=0.813 testpointgrid=0.025 allowsidetop=TRUE allowsidebottom=TRUE usegrid=TRUE gridtolerance=0
PlaneClearance [All] p1: clearance=0.508
PlaneConnect [All] p1: planeconnectstyle=NoConnect reliefexpansion=0.508 reliefentries=4 reliefconductorwidth=0.254 reliefairgap=0.254
PolygonConnect [All] p1: connectstyle=NoConnect reliefconductorwidth=0.254 reliefentries=4 polygonreliefangle="45 Angle" airgapwidth=0.254
PolygonConnect PolygonConnect_1 [All] p2: connectstyle=Direct reliefconductorwidth=0.254 reliefentries=4 polygonreliefangle="90 Angle" airgapwidth=0.254
RoutingPriority [All] p1: routingpriority=1
RoutingVias [All] p1: holewidth=0.711 width=1.27 viastyle="Through Hole" minholewidth=0.711 minwidth=1.27 maxholewidth=0.711 maxwidth=1.27
SilkToSolderMaskClearance SilkscreenOverComponentPads [IsPad] p1: minsilkscreentomaskgap=0.254 clearancetoexposedcopper=TRUE
SolderMaskExpansion [All] p1: expansion=0.102
Width [All] p1: maxlimit=2.54 minlimit=0.025 preferedwidth=0.762
23 further rules are at their usual default settings.

## Components (designator, comment, footprint, x,y, rotation, side; value= is the part's Value field where it differs from the comment)
1M "1M" 0805#1 -621.546,-13.063 r180 top
2 "LCD19SEG" LCD -629.285,-37.846 r0 top locked
3C1_1_2 "22P" 0805#1 -620.479,-19.746 r270 top
3C1_2_1 "104" 0805#1 -658.79,4.724 r270 top
3C1_4_1 "104" 0805#1 -668.63,-37.92 r0 top
3C1_4_2 "104" 0805#1 -648.335,5.654 r90 top
3C1_5_1 "104" 0805#1 -628.442,-12.949 r0 top
3C1_8_1 "10K" 1206-A -679.724,-38.009 r0 top
3C1_9_1 "104" 0805#1 -675.825,-37.978 r0 top
3C1_10_1 "4k7" 1206-A -658.624,-42.344 r0 top
3C1_11_1 "4k7" 1206-A -658.65,-39.322 r0 top
3C1_13 "104" 0805#1 -625.241,9.797 r0 top
3C1_14 "104" 0805#1 -613.484,-3.449 r90 top
3C2_1_2 "22P" 0805#1 -625.267,-19.647 r270 top
3C6_1_1_1 "104" 104TC#1 -628.02,9.797 r180 top
6*6*5 "Comment" 按键 -691.718,-31.593 r0 top locked
6*6*6 "Comment" 按键 -691.843,-42.875 r0 top locked
56 "2W8.2" 2WR#1 -680.303,-13.104 r90 top
57 "2W240" 2WR#2 -669.95,-12.108 r90 top
58 "2W240" 2WR#2 -664.596,-12.055 r90 top
1040 "1040" 2551 -657.606,-6.276 r180 top
4275_1 "4275" TO-263 -668.625,2.926 r0 top
_1_1_2 "4M" 16M -621.546,-16.949 r270 top
_7_1 "W" 1206-2 -636.232,-37.315 r180 top
_8_1 "W" 1206-2 -619.536,-37.579 r180 top
C1_10_1 "103" 1206-A -609.412,-13.99 r270 top
C4_1_1_1 "4K7" 1206-A -664.159,4.6 r90 top
C6_1_1 "104" 0805#1 -681.347,-11.283 r180 top
C9_12_1 "104/100V" 1206-A -667.017,-25.827 r180 top
C9_18_1 "47P/100V" 0805#2 -675.272,-8.41 r0 top
C9_19_1 "47P/100V" 0805#2 -675.236,-11.011 r0 top
C16_6_1_6_2_1 "50V100uF" RB.1/.25 -654.931,7.194 r0 bottom
C16_6_1_6_2_2 "50V100uF" RB.1/.25 -680.57,-8.479 r180 bottom
C22_1 "104/100V" 1206-A -664.977,-6.871 r270 top
IC3 "24C04" SO-8 -664.294,-42.004 r0 bottom
J1_1_1_1 "+  CON4" SIP4#1 -681.109,-40.924 r180 top
J1_1_1_2 "+  CON3" SIP4#2 -609.262,3.137 r270 top
M7 "" M7-A -684.042,-34.254 r90 top
R19_1_5_1 "33K" 1206-A -609.437,-8.534 r270 top
R46_16_2 "1K2" 1206 -637.891,-34.033 r0 top
R46_17_2 "1K2" 1206 -621.297,-34.503 r0 top
R46_17_3 "330" 1206 -614.142,2.964 r180 top
R46_17_4 "330" 1206 -614.177,5.878 r180 top
R49_5_1 "103" 1206-A -612.14,-8.534 r270 top
R51_1_1 "33K" 1206-A -609.239,-20.043 r90 top
R52_1_1 "10K" 1206-A -612.145,-13.965 r90 top
R115_1_1 "104" 104TC#2 -661.37,4.724 r270 top
? "Y600 CAN-JC" QUAD100 -622.3,6.731 r270 top

## Footprints (in the part's own frame and the unit in brackets; to place one, negate y for a bottom-side part, rotate by r counter-clockwise, add the part's x,y. Pads: shape width x height; smd on the part's side, far side on the other; paste and mask are expansions set on the pad)
2WR#1 [mm]
  round 2.5 hole 1: 1(-0.505,-0.03) 2(-19.604,0)
2WR#2 [mm]
  round 2.5 hole 1.5: 1(-0.505,-0.03) 2(-19.604,0)
16M [mm]
  oval 2.5x1.8 hole 0.8: 12(0,0) 13(0,-5.08)
104TC#1 [mil]
  rect 60x60 smd: 1(0,0) 2(90,0)
  silkscreen extent -50,-45 140,45
104TC#2 [mil]
  rect 60x55.12 smd: 1(90,0) 2(0,0)
  silkscreen extent -50,-45 140,45
0805#1 [mil]
  rect 60x60 smd: 1(-0.28,0.39) 2(89.72,0.39)
  silkscreen extent -50,-45 140,45
0805#2 [mil]
  rect 59.05x60 smd: 1(0.16,0.57)
  rect 59.06x60 smd: 2(90.16,0.57)
  silkscreen extent -50,-44 140,46
1206 [mm]
  rect 1.8x2 smd: 1(-1.8,0) 2(1.8,0)
  silkscreen extent -3.05,-1.4 3.05,1.4
1206-2 [mil]
  rect 75x75 smd: 5(135,0) 6(0,0)
  silkscreen extent -55,-56 186,59
1206-A [mm]
  rect 1.4x1.8 smd: 1(-1.6,0) 2(1.6,0)
  silkscreen extent -2.65,-1.25 2.65,1.25
2551 [mil]
  rect 28x80 smd: 1(0,0) 2(50,0) 3(100,0) 4(150,0) 5(150,220) 6(100,220) 7(50,220) 8(0,220)
  silkscreen extent -20,60 180,160
LCD [mm]
  round 1.8 hole 1.8: 0(-19.3,0) 0(19.3,0)
  oval 2x2.45 hole 0.8: 1(-13.97,11.45) 2(-11.43,11.45) 3(-8.89,11.45) 4(-6.35,11.45) 5(-3.81,11.45) 6(-1.27,11.45) 7(1.27,11.45) 8(3.81,11.45) 9(6.35,11.45) 10(8.89,11.45) 11(11.43,11.45) 12(13.97,11.45) 14(-11.43,-11.45) 15(-8.89,-11.45) 16(-6.35,-11.45) 17(-3.81,-11.45) 18(-1.27,-11.45) 19(1.27,-11.45) 20(3.81,-11.45) 21(6.35,-11.45) 22(8.89,-11.45) 23(11.43,-11.45) 24(13.97,-11.45)
  round 1.016 all layers, no hole: 13(-13.97,-11.45)
  silkscreen extent -21.05,-12.7 21.05,12.7
M7-A [mm]
  rect 2.2x2 smd: 1(-2.45,0) 2(2.45,0)
  silkscreen extent -4.06,-1.6 4.57,1.6
QUAD100 [mm]
  rect 1.5x0.25 smd: 1(0,0) 2(0,-0.5) 3(0,-1) 4(0,-1.5) 5(0,-2) 6(0,-2.5) 7(0,-3) 8(0,-3.5) 9(0,-4) 10(0,-4.5) 11(0,-5) 12(0,-5.5) 13(0,-6) 14(0,-6.5) 15(0,-7) 16(0,-7.5) 17(0,-8) 18(0,-8.5) 19(0,-9) 20(0,-9.5) 21(0,-10) 22(0,-10.5) 23(0,-11) 24(0,-11.5) 25(0,-12) 51(15.5,-12) 52(15.5,-11.5) 53(15.5,-11) 54(15.5,-10.5) 55(15.5,-10) 56(15.5,-9.5) 57(15.5,-9) 58(15.5,-8.5) 59(15.5,-8) 60(15.5,-7.5) 61(15.5,-7) 62(15.5,-6.5) 63(15.5,-6) 64(15.5,-5.5) 65(15.5,-5) 66(15.5,-4.5) 67(15.5,-4) 68(15.5,-3.5) 69(15.5,-3) 70(15.5,-2.5) 71(15.5,-2) 72(15.5,-1.5) 73(15.5,-1) 74(15.5,-0.5) 75(15.5,0)
  rect 0.25x1.5 smd: 26(1.75,-13.75) 27(2.25,-13.75) 28(2.75,-13.75) 29(3.25,-13.75) 30(3.75,-13.75) 31(4.25,-13.75) 32(4.75,-13.75) 33(5.25,-13.75) 34(5.75,-13.75) 35(6.25,-13.75) 36(6.75,-13.75) 37(7.25,-13.75) 38(7.75,-13.75) 39(8.25,-13.75) 40(8.75,-13.75) 41(9.25,-13.75) 42(9.75,-13.75) 43(10.25,-13.75) 44(10.75,-13.75) 45(11.25,-13.75) 46(11.75,-13.75) 47(12.25,-13.75) 48(12.75,-13.75) 49(13.25,-13.75) 50(13.75,-13.75) 76(13.75,1.75) 77(13.25,1.75) 78(12.75,1.75) 79(12.25,1.75) 80(11.75,1.75) 81(11.25,1.75) 82(10.75,1.75) 83(10.25,1.75) 84(9.75,1.75) 85(9.25,1.75) 86(8.75,1.75) 87(8.25,1.75) 88(7.75,1.75) 89(7.25,1.75) 90(6.75,1.75) 91(6.25,1.75) 92(5.75,1.75) 93AD(5.25,1.75) 94AD(4.75,1.75) 95AD(4.25,1.75) 96AD(3.75,1.75) 97AD(3.25,1.75) 98AD(2.75,1.75) 99AD(2.25,1.75) 100AD(1.75,1.75)
  silkscreen extent 1.28,-12.46 14.21,0.46
RB.1/.25 [mil]
  rect 80x80 hole 31.5: 1(0,0)
  round 80 hole 31.5: 2(160,0)
  silkscreen extent -116,-150 230,150
SIP4#1 [mm]
  rect 1.778x2.032 hole 0.9: 1(0,0)
  oval 1.8x2 hole 0.9: 2(-2.54,0) 3(-5.08,0) 4(-7.62,0)
SIP4#2 [mm]
  rect 1.778x2.032 hole 0.9: 1(0,0)
  oval 1.8x2 hole 0.9: 2(-2.54,0) 3(-5.08,0)
SO-8 [mil]
  oval 80x24 smd far side: 1(-179.75,-73.19) 2(-179.75,-23.19) 3(-179.75,26.81) 4(-179.75,76.81) 5(40.25,76.81) 6(40.25,26.81) 7(40.25,-23.19) 8(40.25,-73.19)
TO-263 [mil]
  rect 475x450 smd: 0(-340.03,-0.49)
  rect 100x42 smd: 1(29.97,-134.5) 2(29.97,-67.49) 3(29.97,-0.49) 4(29.97,66.5) 5(29.97,133.51)
  silkscreen extent -582,-220 50,220
按键 [mm]
  rect 3x2 smd: 4(-2.35,0) 4(2.35,0)
  silkscreen extent -3.2,-2.93 3.2,3.07

## Free pads (board coordinates)
  round 1.524 hole 0.762: 0(-691.086,-26.152) 0(-627.471,-0.292) 1(-689.092,-26.152) 1(-629.83,-2.796) 2(-690.037,-24.785) 2(-666.323,7.945) 3(-691.256,-36.805) 3(-606.534,-24.719) 4(-688.838,-36.929) 5(-690.204,-38.42) 6(-643.225,-30.683) 19(-609.135,0.13) 20(-607.494,0.13) 21(-606.562,-23.465) 22(-627.896,-20.762) 24(-664.977,-3.498) 25(-664.977,7.95) 26(-664.69,-35.806) 27(-666.29,-35.806) 28(-654.213,-46.683) 29(-652.775,-46.683) 30(-651.485,-46.683) 31(-609.242,-34.653) 32(-609.117,-33.114) 33(-610.408,-34.653) 35(-690.006,-9.972) 36(-691.37,-10.01) 37(-688.569,-9.972) 38(-659.943,-48.915) 39(-658.652,-48.915) 40(-657.164,-48.915) 41(-642.455,-37.394) 42(-642.468,-38.672) 45(-681.698,-46.683) 46(-683.044,-46.683) 47(-684.324,-46.683) 48(-691.01,-17.648) 49(-689.374,-17.823) 50(-690.377,-18.778) 51(-675.219,-16.434) 52(-670.56,-9.949) 53(-669.369,-9.949) 54(-677.987,-8.763) 55(-677.987,-10.417) 56(-690.85,4.961) 57(-689.559,4.862) 59(-690.75,-1.687) 60(-689.31,-1.687)
  rect 5.08x5.08 all layers, no hole: 34(-690.184,-37.244) 34(-690.105,-17.861) 34(-690.001,-2.004)
  round 5.08 all layers, no hole: 34(-690.006,-9.972) 34(-689.994,-25.817) 34(-689.971,5.248)
  round 1.524 hole 3.2: 62(-694.248,11.46) 62(-693.9,-48.021) 63(-606.91,-44.303)

## Via types
v1: diameter 0.8, hole 0.5, TopLayer to BottomLayer, 36 vias
v2: diameter 1.27, hole 0.711, TopLayer to BottomLayer, 4 vias

## Nets (pads, with @x,y where several pads share a name; then routed paths per layer and width w, separated by ;. In a path a pad name is that pad's centre, name@x,y a point inside that pad or via, vN(x,y) a via of type N, cw(c..) or ccw(c..) an arc to the next point about the centre after c; other vN are vias at no path point)
00-0: 
0-00: 
0A16: 
1-1: 
2: 
8.1: 
8.2: 
10-4: 
10--4: 
12.8V: 56.2 M7.2 | length 4.1
  TopLayer w1.524: M7.2 -681.207,-31.804 56.2
12V: 
12V充电故障: 
13: 
"16M 1": 1M.2 3C2_1_2.1 ?.72 _1_1_2.13 | length 12.1
  TopLayer w0.229: 1M.2@-623.8,-13.073 ?.72
  TopLayer w0.762: -625.577,-17.043 -625.577,-19.32 3C2_1_2.1
  TopLayer w1.27: _1_1_2.13 -623.825,-14.148 1M.2
"16M 2": 1M.1 3C1_1_2.1 ?.73 _1_1_2.12 | length 11.1
  TopLayer w0.229: ?.73 -623.3,-11.098 1M.1@-621.546,-12.852
  TopLayer w0.762: 3C1_1_2.1@-621.02,-19.911 _1_1_2.12@-621.02,-17.465
  TopLayer w1.27: _1_1_2.12@-621.539,-16.942 1M.1
20: 
21: 
22: 
23: 
24: 
25: 
26: 
88: 
104-1: 
104-2: 
111: 
112: 
888: 
2510CS: 
2510INT: 
2510RST: 
2510SCK: 
2510SI: 
2510SO: 
2551RS: 
+5V: 
+8V: 
+9.6V: 56.1 4275_1.1 C6_1_1.1 C16_6_1_6_2_2.1 | length 24.7
  TopLayer w1.016: C16_6_1_6_2_2.1 -680.57,-6.716 -679.287,-5.433 -668.675,-5.433 -667.863,-4.621 4275_1.1
  TopLayer w1.524: C16_6_1_6_2_2.1 -680.57,-13.312 56.1
+13.5: M7.1 pad.28 pad.29 pad.30 pad.31 pad.32 pad.33 pad.34@-690.105,-17.861 pad.45 pad.46 pad.47 pad.48 pad.49 pad.50 R46_16_2.2 R46_17_2.2 R51_1_1.1 | length 156.6
  TopLayer w0.762: R46_16_2.2 -634.676,-32.619 pad.32@-609.366,-32.619 ; R46_17_2.2 -619.497,-32.758 ; pad.31@-609.239,-34.704 R51_1_1.1
  TopLayer w1.016: pad.34@-688.922,-18.674 -686.214,-21.382 -686.214,-36.152 -685.661,-36.704 M7.1 ; pad.47@-683.905,-46.647 M7.1@-683.905,-36.704 ; pad.45 pad.30@-651.756,-46.683
  BottomLayer w1.016: pad.30 -651.485,-35.857 -650.281,-34.653 pad.31
+13.5V: 
A: 
A0: 
A01: 
A1: 
A2: 
A3: 
A4: 
A6: 
A10: 
ABS: 
ABS-: ?.33 | length 22.5
  TopLayer w0.229: v1(-646.168,0.892) -645.579,1.481 ?.33
  BottomLayer w0.229: -650.974,9.682 -650.951,9.66 ; -650.681,10.414 -649.478,10.414 -648.411,9.347 -648.411,3.134 v1(-646.168,0.892)
AREF: 
B: 
battery+: 
BKGD: 
BUSY: 
C1: 
CAN-G: 
CAN-唤醒: 
CAN_H: 58.1 1040.7 C9_18_1.2 pad.34@-690.001,-2.004 pad.54 pad.55 pad.59 pad.60 | length 110.3
  TopLayer w0.762: -658.876,-15.542 1040.7
  TopLayer w1.016: C9_18_1.2 -672.982,-7.126 -673.405,-6.703 -677.182,-6.703 -677.987,-7.508 -677.987,-33.058 -676.786,-34.26 -676.029,-34.26 -660.646,-34.26 -658.876,-32.489 -658.876,-15.542
  BottomLayer w1.016: pad.34@-689.757,-1.687 -680.928,-1.687 -677.987,-4.628 -677.987,-10.599 -672.805,-15.781 -665.904,-15.781 -664.566,-14.442 58.1
CAN_L: 57.1 1040.6 C9_19_1.2 pad.34@-689.971,5.248 pad.52 pad.53 pad.56 pad.57 | length 46.5
  TopLayer w0.762: -668.251,-9.949 -660.425,-9.949 -660.146,-10.229 1040.6
  TopLayer w1.016: C9_19_1.2@-672.47,-10.917 -671.502,-9.949 -668.251,-9.949
  BottomLayer w1.016: pad.34@-689.907,4.862 -674.182,4.862 -670.56,1.24 pad.52
CAN_RXD: 
CAN_TXD: 
CAN_唤醒: 1040.4 ?.27 | length 34.8
  TopLayer w0.229: 1040.4 -661.416,-4.188 -661.035,-3.807 -657.845,-3.807 -657.197,-3.16 -657.197,3.241 -655.957,4.481 ?.27
CHARGE-: 
CK_ZERO_LCH: 
COM0: 2.12 ?.88 | length 29.6
  TopLayer w0.229: ?.88 -616.671,-1.019 -615.897,-1.794 -615.897,-23.818
  TopLayer w1.27: 2.12@-615.412,-26.373 -615.412,-23.795
COM1: 2.11 ?.87 | length 29.2
  TopLayer w0.203: ?.87 -617.169,-1.519 -616.42,-2.268 -616.42,-23.584 -617.855,-25.019
  TopLayer w1.27: 2.11 -617.855,-25.019
COM2: 2.10 ?.86 | length 30.2
  TopLayer w0.229: ?.86 -617.601,-2.019 -616.89,-2.73 -616.89,-23.19 -617.626,-23.927 -619.912,-23.927 -620.395,-24.409
  TopLayer w1.27: 2.10 -620.395,-24.668
COM3: 2.9 ?.85 | length 31.3
  TopLayer w0.229: -622.935,-23.978 -622.402,-23.444 -617.931,-23.444 -617.398,-22.911 -617.398,-2.972 -617.851,-2.519 ?.85
  TopLayer w1.27: 2.9 -622.935,-24.313
CRUISE-: 
CS#: 
D: 
D0: 
D1: 
D2: 
D3: 
D4: 
D4-1: 
D5: 
D5-1: 
D6: 
D6-1: 
D7: 
D7-1: 
D8: 
D103-1: 
DETENT-: 
DISP键: 
EBD: 
ECU分频: 
ENGINER-: 
EPS-: 
F1: 
FAR+: 
FAR+1: 
FAR-: 
fdj: 
FDJ-: 
FMQ: 
FMQ12V: 
FMQ+: ?.31 | length 31.1
  TopLayer w0.229: v1(-653.953,1.603) -653.953,2.106 -653.578,2.481 ?.31
  BottomLayer w0.229: -660.923,9.807 -660.923,6.091 -659.882,5.05 -657.4,5.05 v1(-653.953,1.603)
FMQ-1: ?.30 | length 33.9
  TopLayer w0.229: v1(-655.241,1.577) -655.241,1.933 -654.193,2.981 ?.30
  BottomLayer w0.229: -663.956,9.779 -663.956,8.89 -663.636,8.57 -663.636,6.441 -658.772,1.577 v1(-655.241,1.577)
FMQ-2: 
FMQ-3: 
FORST+: 
FPGA_RST#: 
GND: 3C1_1_2.2 3C1_2_1.2 3C1_4_1.1 3C1_4_2.2 3C1_5_1.1 3C1_9_1.2 3C1_13.1 3C1_14.1 3C2_1_2.2 3C6_1_1_1.2 6*6*5.4@-694.068,-31.593 6*6*6.4@-694.193,-42.875 1040.2 4275_1.3 ?.8 ?.18 ?.61 ?.70 ?.71 ?.91 _7_1.6 _8_1.6 C1_10_1.2 C6_1_1.2 C9_12_1.2 C9_18_1.1 C9_19_1.1 C16_6_1_6_2_1.2 C16_6_1_6_2_2.2 C22_1.2 IC3.1 IC3.2 IC3.3 IC3.4 IC3.7 J1_1_1_1.4 J1_1_1_2.3 pad.0@-627.471,-0.292 pad.1@-629.83,-2.796 pad.34@-690.006,-9.972 pad.35 pad.36 pad.37 pad.38 pad.39 pad.40 pad.41 pad.42 pad.51 R49_5_1.2 R52_1_1.1 R115_1_1.1 | length 451
  TopLayer w0.229: -630.8,0.176 3C6_1_1_1.2@-630.8,9.646 ; -629.3,-12.088 -629.3,-7.401 -629.112,-7.214 -624.688,-7.214 -624.3,-7.601 ?.71 ; -625.8,0.709 3C1_13.1@-625.8,9.736 ; ?.91 -615.354,0.481 -614.848,-0.025 -614.848,-2.177 3C1_14.1@-613.568,-3.456
  TopLayer w0.508: IC3.2 IC3.7 ; R115_1_1.1@-661.363,2.445 -658.627,2.445 -658.627,-2.179 ; 1040.2 -658.876,-8.263 -659.196,-8.583 -666.082,-8.583 -666.826,-7.838 -666.826,-2.903 -666.107,-2.184 -658.691,-2.184 ; C16_6_1_6_2_1.2 -650.128,7.933 3C1_4_2.2 ; 3C1_5_1.1@-629.178,-13.668 3C1_5_1.1 ; -629.178,-11.961 -629.178,-21.611 -628.49,-22.299 3C1_1_2.2@-620.654,-22.299 ; -625.884,1.463 -619.633,7.714 -619.633,9.959 -619.077,10.516 -609.651,10.516 -609.171,10.036 J1_1_1_2.3@-609.171,7.597
  TopLayer w0.762: 6*6*5.4@-694.238,-31.278 -694.238,-43.381 -688.703,-48.915 -684.896,-48.915 ; pad.51 -675.219,-23.343 -672.735,-25.827 C9_12_1.2 ; J1_1_1_1.4 -669.039,-40.924 ; IC3.4 3C1_4_1.1@-668.859,-38.147 ; -636.232,-39.472 _7_1.6 ; _8_1.6 -619.536,-38.918 -620.179,-39.56 -640.895,-39.56 -641.886,-38.57 -641.886,-32.545 -640.944,-31.603 -612.767,-31.603 -612.244,-31.079 -612.244,-21.28 -614.083,-19.441 -614.083,-3.971 3C1_14.1@-613.568,-3.456 ; -614.052,-10.134 R49_5_1.2 ; -613.972,-15.59 C1_10_1.2
  TopLayer w1.016: -684.896,-48.915 pad.40 ; -684.594,-11.298 -684.594,-5.751 -682.836,-3.993 -670.644,-3.993 -670.113,-3.462 -670.113,8.26 ; pad.51 C9_18_1.1@-675.219,-8.444 ; J1_1_1_1.4@-673.546,-40.867 3C1_9_1.2 ; -670.1,2.914 4275_1.3
  TopLayer w1.27: -627.177,-6.698 -627.177,-2.482
  TopLayer w2.54: pad.37 -684.743,-9.972
  BottomLayer w1.016: C16_6_1_6_2_2.2@-684.594,-8.484 -684.594,-15.187 -683.346,-16.434 pad.51 ; J1_1_1_1.4 -659.354,-40.924 -656.346,-37.917 -656.346,-8.473 ; pad.38 -645.109,-48.915 -642.704,-46.51 pad.41@-642.704,-37.554
  BottomLayer w1.27: v1@-662.356,-2.464 -656.346,-8.473
  other v1: -631.655,-4.117 -626.242,-3.594 -662.381,-2.215 -661.467,-2.215 -630.347,0.968 -625.368,2.017
GND1: 
GND-2: 
GNG-1: 
GRIP-: 
H1: 
HT1621_CS: 
HT1621_DAT: 
HT1621_IRQ: 
HT1621_WR: 
"IIC SCL": 
"IIC SDA": 
JY-: 
k3: 
KONG: 
L: 
L0: 4275_1.2 C4_1_1_1.1 | length 4.4
  TopLayer w1.016: 4275_1.2 -665.947,1.212 C4_1_1_1.1
L1: 
L2: 
L3: 
L4: 
L5: 
L10: 4275_1.4 R115_1_1.2 | length 6.4
  TopLayer w1.016: 4275_1.4 R115_1_1.2@-661.479,4.615
L-P-C+: 
L-P-S+: 
LAMP: 
LAMP+: 
LCD_AO: 
LCD_CS1: 
LCD_D0: 
LCD_D1: 
LCD_D2: 
LCD_D3: 
LCD_D4: 
LCD_D5: 
LCD_D6: 
LCD_D7: 
LCD_OE#: 
LCD_PWM: 
LCD_RD: 
LCD_REST: 
LCD_WR: 
LCH-S: 
LCH-TIME-JL: 
LCH_COS+: ?.12
LCH_COS-: ?.11
LCH_IN: 
LCH_SIN+: ?.9
LCH_SIN-: ?.10
LCH_ZERO_LCH: ?.13
LCHBX_LED3: 
LCHBX_LED4: 
LEFT+: 
LGND: 
M0: 
MCP2510_CS: 
MCP2510_INT: 
MCP2510_RST: 
MCP2510_SCK: 
MCP2510_SI: 
MCP2510_SO: 
MCU_RST: 
MCU_STB: 
MD0: 
MD2: 
MIL: 
N: 
Net3C5_1: 
Net57-1: 
Net57-2: 
Net58-1: 
Net58-2: 
NetC4_2: 
NetC6_2: 
NetC26_1: 
NetD2_K: 
NetD6_2: 
NetD7_1: 
NetD22_1: 
NetIC1_23: 
NetIC1_24: 
NetIC3_16: 
NetJ2_1: 
NetJ2_2: 
NetK1-3: 
NetK1_2: 
NetLED1: 
NetLED1_A: 
NetLED2_K: 
NetLED3_A: 
NetLED3_K: 
NetLED4_A: 
NetLED5_A: 
NetLED6_A: 
NetLED6_K: 
NetLED7_A: 
NetLED7_K: 
NetLED8_K: 
NetLED9_A: 
NetLED10_K: 
NetLED11_K: 
NetLED12_K: 
NetLED13_K: _7_1.5 R46_16_2.1 | length 3.3
  TopLayer w0.762: _7_1.5@-639.691,-37.285 R46_16_2.1
NetLED14_K: 
NetLED16_A: 
NetLED16_K: 
NetLED17_A: 
NetLED18_K: 
NetLED20_K: 
NetLED22_A: 
NetLED22_K: 
NetLED24_K: 
NetLED29_A: 
NetLED37_A: 
NetLED37_K: 
NetLED128_A: 
NetQ2_2: 
NetQ3_2: 
NetQ4_2: 
NetQ6_3: 
NetQ7_1: 
NetQ11_B: 
NetQ11_C: 
NetR2_2: 
NetR4_2: 
NetR6_2: 
NetR10_2: 
NetR18_2: 
NetR19_1: 
NetR21_1: 
NetR22_2: 
NetR23_2: 
NetR26_2: 
NetR27_2: 
NetR31_1: 
NetR32_2: 
NetR33_2: 
NetR34_2: 
NetR35_2: 
NetR36_2: 
NetR37_2: 
NetR38_2: 
NetR39_2: 
NetR40_2: 
NetR41_2: 
NetR44_1: 
NetR46_2: 
NetR47_2: _8_1.5 R46_17_2.1 | length 2.9
  TopLayer w0.762: _8_1.5@-623.097,-37.448 R46_17_2.1
NetR48_2: 
NetR49_2: 
NetR50-1: 
NetR50_2: 
NetR51-1: 
NetR51_2: C1_10_1.1 R19_1_5_1.2 R51_1_1.2 R52_1_1.2 | length 14.5
  TopLayer w0.762: R52_1_1.2 -607.865,-12.365 ; R19_1_5_1.2 -608.409,-10.134 -607.705,-10.838 -607.705,-16.909 R51_1_1.2
NetR52-1: 
NetR53-1: 
NetR53_2: 
NetR54-1: 
NetR54_2: 
NetR55-1: 
NetR55-2: 
NetR55_2: 
NetR56: 
NetR56-1: 
NetR60: 
NetR60-1: 
NetR113_1: 
NetR121_1: 
NetRP1_3: 
NetU6_33: 
NetU6_37: 
NetU6_40: 
NetU6_45: 
NetU6_46: 
NetU6_50: 
NetU6_58: 
NetU6_82: 
NetU6_83: 
NetU9_5: 
OIL: 
OIL-: 
OIL_BXLED1: 
OIL_COS+: ?.6
OIL_COS-: ?.5 | length 7.5
  TopLayer w0.229: ?.5 -624.3,7.787 -623.692,8.395 -622.329,8.395 -621.393,9.331 v1(-621.095,9.331)
  BottomLayer w0.229: -622.704,10.584 -621.607,10.584 -621.095,10.073 v1(-621.095,9.331)
OIL_S: 
OIL_SIN+: ?.3 | length 7.7
  TopLayer w0.229: ?.3 -623.3,7.738 -623.125,7.912 -621.266,7.912 v1(-621.217,7.96)
  BottomLayer w0.229: v1(-621.217,7.96) -619.115,7.96 -618.508,8.567 -618.508,10.076
OIL_SIN-: ?.4
OIL_ZERO_OIL: ?.99AD | length 14
  TopLayer w0.229: ?.99AD -618.111,4.481 -617.571,5.022 -617.571,6.993 -617.197,7.366 -613.725,7.366 v1(-612.778,8.313)
  BottomLayer w0.229: v1(-612.778,8.313) -611.701,8.313 -611.215,8.799 -611.215,10.488
OSC1: 
OSC2: 
OSC3: 
OSC4: 
P: 
P00: 
P01: 
P53: ?.93AD R19_1_5_1.1 R49_5_1.1 | length 20.2
  TopLayer w0.229: ?.93AD -611.637,1.481 -610.657,0.5 -610.657,-2.108
  TopLayer w0.762: R49_5_1.1@-612.094,-6.797 R19_1_5_1.1@-609.267,-6.797
  TopLayer w1.016: -610.657,-6.599 -610.657,-2.108
P54: 
p78: 
PAB-: 
PAB--: 
POWER_CTL: 
"Q Y IN2": 
R: 
R1: 
R1-1: 
R1-2: 
R2: 
R3: 
R12-1: 
R12-2: 
R13-1: 
R17-1: 
R17-2: 
R18-1: 
R18-2: 
R19-1: 
R19-2: 
R20-1: 
R20-2: 
RIGHT+: 
ROTATEIN: 
RST: 
RXCAN: 
RXD: 
RXDIN: 
S-1: 
SAFE-: 
sb+: 6*6*6.4@-689.493,-42.875 J1_1_1_2.1 pad.3@-691.256,-36.805 pad.4 pad.5 pad.34@-690.184,-37.244 R46_17_3.1 | length 167.8
  TopLayer w0.762: 6*6*6.4@-689.493,-42.875 pad.34@-689.493,-38.046
  TopLayer w1.27: R46_17_3.1@-612.169,3.137 J1_1_1_2.1
  BottomLayer w0.762: pad.34@-690.415,-37.917 -696.044,-37.917 -696.651,-37.31 -696.651,12.504 -695.32,13.835 -607.461,13.835 -605.831,12.205 -605.831,4.47 -607.164,3.137 J1_1_1_2.1
sb-: 6*6*5.4@-689.368,-31.593 J1_1_1_2.2 pad.0@-691.086,-26.152 pad.1@-689.092,-26.152 pad.2@-690.037,-24.785 pad.34@-689.994,-25.817 R46_17_4.1 | length 144.8
  TopLayer w0.762: 6*6*5.4@-689.368,-31.593 pad.1@-689.368,-26.274
  TopLayer w1.27: R46_17_4.1@-612.176,5.677 J1_1_1_2.2
  BottomLayer w0.762: pad.0@-691.002,-26.657 -694.657,-26.657 -695.635,-25.679 -695.635,5.702 -688.518,12.819 -607.882,12.819 -606.847,11.784 -606.847,6.551 -607.72,5.677 J1_1_1_2.2
SCLK: 
SDO: 
SEG0: 2.8 ?.60 | length 20.7
  TopLayer w0.229: ?.60 -629.8,-22.391 -629.27,-22.921 -627.141,-22.921 -625.475,-24.587
  TopLayer w1.27: 2.8 -625.475,-24.587
SEG1: 2.7 ?.59 | length 19.4
  TopLayer w0.229: ?.59 -630.3,-22.897 -629.793,-23.404 -628.305,-23.404 -628.015,-23.693 -628.015,-24.694
  TopLayer w1.27: 2.7 -628.015,-24.694
SEG2: 2.6 ?.58 | length 17.4
  TopLayer w0.229: -630.8,-24.453 ?.58
  TopLayer w1.27: 2.6@-630.8,-26.151 -630.8,-24.453
SEG3: 2.5 ?.57 | length 18.4
  TopLayer w0.229: -633.095,-23.426 -633.095,-14.98 -631.3,-13.185 ?.57
  TopLayer w1.27: 2.5 -633.095,-23.426
SEG4: 2.4 ?.56 | length 20.7
  TopLayer w0.229: -635.635,-23.508 -635.635,-14.066 -634.952,-13.383 -632.377,-13.383 -631.8,-12.807 ?.56
  TopLayer w1.27: 2.4 -635.635,-23.508
SEG5: 2.3 ?.55 | length 22.5
  TopLayer w0.229: -638.175,-23.528 -638.175,-13.683 -637.344,-12.852 -633.219,-12.852 -632.3,-11.933 ?.55
  TopLayer w1.27: 2.3 -638.175,-23.528
SEG6: 2.2 ?.54 | length 24.5
  TopLayer w0.229: -640.715,-23.503 -640.715,-13.31 -639.775,-12.37 -633.572,-12.37 -632.8,-11.598 ?.54
  TopLayer w1.27: 2.2 -640.715,-23.503
SEG7: 2.1 ?.53 | length 26.6
  TopLayer w0.229: -643.255,-23.556 -643.255,-12.852 -642.29,-11.887 -634.037,-11.887 -633.3,-11.151 ?.53
  TopLayer w1.27: 2.1 -643.255,-23.556
SEG8: 2.24 ?.52 | length 79.2
  TopLayer w0.229: ?.52 -633.8,-10.967 -634.238,-11.405 -643.915,-11.405 -644.754,-12.243 -644.754,-39.751 -644.195,-40.31 -616.359,-40.31 -615.315,-41.354 -615.315,-46.208
  TopLayer w1.27: 2.24 -615.315,-46.208
SEG9: 2.23 ?.51 | length 77.2
  TopLayer w0.229: ?.51 -634.3,-10.451 -634.746,-10.897 -644.474,-10.897 -645.338,-11.76 -645.338,-40.081 -644.627,-40.792 -619.051,-40.792 -617.855,-41.989 -617.855,-46.291
  TopLayer w1.27: 2.23 -617.855,-46.291
SEG10: 2.22 ?.49 | length 74
  TopLayer w0.229: ?.49 -638.486,-6.519 -642.381,-10.414 -644.674,-10.414 -645.82,-11.56 -645.82,-40.597 -645.135,-41.283 -621.513,-41.283 -620.395,-42.4 -620.395,-46.271
  TopLayer w1.27: 2.22 -620.395,-46.271
SEG11: 2.21 ?.48 | length 72.7
  TopLayer w0.229: ?.48 -638.668,-6.019 -642.581,-9.931 -644.874,-9.931 -646.328,-11.386 -646.328,-41.087 -645.556,-41.859 -624.134,-41.859 -622.935,-43.058 -622.935,-46.408
  TopLayer w1.27: 2.21 -622.935,-46.408
SEG12: 2.20 ?.47 | length 71.5
  TopLayer w0.229: ?.47 -638.851,-5.519 -642.781,-9.449 -645.074,-9.449 -646.811,-11.186 -646.811,-41.656 -646.112,-42.355 -626.542,-42.355 -625.475,-43.421 -625.475,-46.319
  TopLayer w1.27: 2.20 -625.475,-46.319
SEG13: 2.19 ?.46 | length 69.9
  TopLayer w0.229: ?.46 -639.033,-5.019 -642.981,-8.966 -645.274,-8.966 -647.294,-10.986 -647.294,-41.856 -646.312,-42.837 -645.008,-42.837 -644.995,-42.85 -629.371,-42.85 -628.015,-44.206 -628.015,-46.38
  TopLayer w1.27: 2.19 -628.015,-46.38
SEG14: 2.18 ?.45 | length 72.3
  TopLayer w0.229: ?.45 -639.216,-4.519 -643.181,-8.484 -645.474,-8.484 -647.776,-10.786 -647.776,-33.945 -650.494,-36.662 -650.494,-42.131 -649.29,-43.335 -631.566,-43.335 -630.847,-44.054 -630.847,-46.561
  TopLayer w1.27: 2.18@-630.847,-49.162 -630.847,-46.561
SEG15: 2.17 ?.44 | length 71.5
  TopLayer w0.229: ?.44 -639.398,-4.019 -643.38,-8.001 -645.674,-8.001 -648.259,-10.586 -648.259,-33.745 -650.977,-36.462 -650.977,-42.761 -649.895,-43.843 -634.009,-43.843 -633.095,-44.757 -633.095,-46.637
  TopLayer w1.27: 2.17 -633.095,-46.637
SEG16: 2.16 ?.43 | length 70.2
  TopLayer w0.229: ?.43 -639.581,-3.519 -643.58,-7.518 -645.873,-7.518 -648.741,-10.386 -648.741,-33.545 -651.459,-36.263 -651.459,-43.111 -650.194,-44.376 -636.377,-44.376 -635.635,-45.118 -635.635,-46.833
  TopLayer w1.27: 2.16 -635.635,-46.833
SEG17: 2.15 ?.42 | length 68.8
  TopLayer w0.229: -638.175,-46.713 -638.175,-45.877 -639.155,-44.897 -650.651,-44.897 -651.942,-43.607 -651.942,-36.063 -649.224,-33.345 -649.224,-10.186 -646.073,-7.036 -643.78,-7.036 -639.763,-3.019 ?.42
  TopLayer w1.27: 2.15 -638.175,-46.713
SEG18: 2.14 ?.41 | length 68
  TopLayer w0.229: -640.715,-47.094 -640.715,-46.215 -641.538,-45.392 -651.596,-45.392 -652.475,-44.514 -652.475,-35.914 -649.707,-33.145 -649.707,-9.987 -646.273,-6.553 -643.98,-6.553 -639.946,-2.519 ?.41
  TopLayer w1.27: 2.14 -640.715,-47.094
SEG19: 
SEG20: 
SEG21: 
SEG22: 
SEG23: 
SEG24: 
SEG25: 
SEG26: 
SEG27: 
SEG28: 
SEG29: 
SEG30: 
SEG31: 
SEG32: 
SEG33: 
SEG34: 
SEG35: 
SPEEDIN: 
SPLIT: 57.2 58.2 1040.5 C9_12_1.1 | length 33.4
  TopLayer w0.762: -661.416,-15.281 1040.5
  TopLayer w1.016: 57.2@-669.849,-31.813 -662.572,-31.813 -661.416,-30.658 -661.416,-15.281 ; 58.2@-665.417,-31.567 C9_12_1.1
SRS-: 
SUMP-: 
SVS-: 
TEM: 
TEM_BXLED1: 
TEM_COS+: 
TEM_COS-: 
TEM_S: 
TEM_SIN+: 
TEM_SIN-: 
TEM_ZERO_TEM: 
TJA1040_STB: 1040.8 ?.38 | length 30.5
  TopLayer w0.229: 1040.8 -656.783,-11.864 -656.232,-11.313 -656.232,-3.635 -655.861,-3.264 -642.783,-3.264 -640.538,-1.019 ?.38
TXCAN: 1040.1 ?.28 | length 30.7
  TopLayer w0.229: 1040.1 -657.606,-4.29 -656.714,-3.399 -656.714,2.918 -655.652,3.981 ?.28
TXD: ?.26
TXD1: 
TXDIN: 
V-IN: 
V-TEST: 
VCC: 3C1_2_1.1 3C1_4_1.2 3C1_4_2.1 3C1_5_1.2 3C1_8_1.1 3C1_10_1.2 3C1_11_1.2 3C1_13.2 3C1_14.2 3C6_1_1_1.1 1040.3 4275_1.5 ?.7 ?.17 ?.62 ?.69 ?.89 ?.92 C4_1_1_1.2 C16_6_1_6_2_1.1 C22_1.1 IC3.8 J1_1_1_1.1 pad.2@-666.323,7.945 pad.3@-606.534,-24.719 pad.19 pad.20 pad.21 pad.22 pad.24 pad.25 pad.26 pad.27 | length 293.5
  TopLayer w0.229: ?.17 -630.3,8.081 -629.897,8.484 -628.353,8.484 -628.02,8.816 3C6_1_1_1.1 ; -628.8,-10.978 ?.62 ; -625.3,-10.975 ?.69 ; ?.7 -625.293,6.738 -625.293,7.634 -623.12,9.807 3C1_13.2 ; ?.89 -621.863,-0.519 -622.221,-0.161 -622.221,0.665 -621.906,0.981 -613.944,0.981 -613.494,0.531 3C1_14.2
  TopLayer w0.508: pad.24 C22_1.1 -664.007,-5.271 -663.59,-5.687 -663.59,-7.488 -663.257,-7.821 -660.585,-7.821 -660.146,-7.381 1040.3 ; C4_1_1_1.2@-664.977,6.383 pad.25 ; 3C1_2_1.1@-658.712,5.103 -648.889,5.103 3C1_4_2.1 ; -628.678,-11.1 -628.467,-11.311 -625.3,-11.311 ; pad.22@-628.231,-21.085 -628.231,-15.007 -625.3,-12.076 -625.3,-10.975 ; 3C6_1_1_1.1 -628.02,12.807 ; -623.161,12.885 -622.962,12.687 3C1_13.2 ; pad.20@-607.319,-0.137 -606.562,-0.894 pad.21
  TopLayer w0.762: IC3.8 -663.271,-35.806
  TopLayer w1.016: J1_1_1_1.1 -681.109,-37.498 -679.417,-35.806 -658.477,-35.806 -657.024,-37.259 3C1_10_1.2 ; 4275_1.5 -655.808,6.317 C16_6_1_6_2_1.1 -649.239,12.885 -623.161,12.885 -609.328,12.885 -607.284,10.841 pad.20@-607.284,-0.213 ; 3C1_4_1.2 pad.27@-666.351,-36.067 ; 3C1_2_1.1 -658.78,6.253
  BottomLayer w0.508: pad.22@-628.317,-21.011 -625.864,-23.465 pad.21
  BottomLayer w1.016: v2(-612.178,0.368) -607.748,0.368 pad.20@-607.319,-0.061
  BottomLayer w1.27: pad.27 -659.323,-35.806 -657.743,-34.227 -657.743,-10.731 pad.24 -663.895,-2.416 -663.895,2.863 -664.977,3.945 pad.25
  other v2: -613.491,0.414
VDD3.3V: 
VDD5V: 
VDIS: 
WD+: 
WEN: 
WR#: 
X1-1: ?.84 | length 28.8
  TopLayer w0.229: v1(-622.304,-3.019) ?.84
  BottomLayer w0.229: v1(-622.304,-3.019) -623.163,-3.019 -623.456,-3.312 -623.456,-7.917 -611.665,-19.708 -607.172,-19.708
X1-2: ?.83 | length 13
  TopLayer w0.203: ?.83 v1(-618.664,-3.519)
  BottomLayer w0.203: v1(-618.664,-3.519) -617.538,-2.393 -608.01,-2.393
X1-3: ?.81 | length 23.5
  TopLayer w0.203: v1(-622.359,-4.519) ?.81
  BottomLayer w0.203: v1(-622.359,-4.519) -622.359,-7.993 -614.898,-15.453 -607.276,-15.453
X1-4: ?.80 | length 14.3
  TopLayer w0.203: ?.80 v1(-618.762,-5.019)
  BottomLayer w0.203: v1(-618.762,-5.019) -616.801,-5.019 -614.845,-6.975 -607.042,-6.975
X1-5: ?.76 | length 15.5
  TopLayer w0.203: ?.76 v1(-618.778,-7.019)
  BottomLayer w0.203: v1(-618.778,-7.019) -614.397,-11.4 -606.816,-11.4
Y1: 
Y2: 
Y3: 
YOULAMP+: 
Z1: 
Z1A: 
Z2: 
Z2A: 
Z3: 
Z3A: 
Z4: 
Z4A: 
Z5: 
Z5A: 
Z6: 
Z6A: 
Z-P-C+: 
Z-P-S+: 
ZHS_COS+: ?.20
ZHS_COS-: ?.19 | length 6.6
  TopLayer w0.229: v1(-632.079,9.144) -631.3,8.365 ?.19
  BottomLayer w0.229: v1(-632.079,9.144) -631.19,10.033 -629.158,10.033 -628.777,10.414
ZHS_SIN+: ?.21 | length 3.9
  TopLayer w0.229: v1(-633.651,8.512) -633.185,8.512 -632.3,7.627 ?.21
  BottomLayer w0.229: v1(-633.651,8.512) -633.651,9.799
ZHS_SIN-: ?.22
ZHS_ZERO_TEM: ?.16
ZS-S: 
ZUOLAMP+: 
位置灯: ?.35 | length 24.2
  TopLayer w0.229: v1(-645.988,-2.126) -643.381,0.481 ?.35
  BottomLayer w0.229: v1(-645.988,-2.126) -645.11,-1.248 -645.11,10.618 -645.16,10.668
位置灯+: 
位置灯-1: 
充电状态: 
制动-: 
制动器处: ?.100AD | length 9.4
  TopLayer w0.229: ?.100AD -618.759,4.981 -618.061,5.679 -618.061,7.767 -617.816,8.012 -615.598,8.012 v1(-615.315,8.296)
  BottomLayer w0.229: v1(-615.315,8.296) -615.315,9.906
制动器进: ?.15
前雾+: 
前雾-OUT: ?.36 | length 23.2
  TopLayer w0.229: v1(-644.467,-2.123) -644.467,-1.925 -642.56,-0.019 ?.36
  BottomLayer w0.229: v1(-644.467,-2.123) -641.182,1.161 -641.182,10.302
前雾灯+: 
动力电池切断: 
动力电池故障: 
动力电池连接+: 
发动机-: 
发动机故障-: 
右转-OUT: ?.98AD
右转向+: 
后雾+: 
后雾-OUT: ?.96AD
唤醒入: 
存储1: 3C1_10_1.1 ?.32 IC3.5 | length 73.4
  TopLayer w0.229: IC3.5 -662.924,-44.303 -655.714,-44.303 -655.203,-43.792 -655.203,-7.577 v1(-654.068,-6.441) ; -660.224,-44.245 3C1_10_1.1 ; v1(-653.895,-2.431) -653.895,0.193 -652.107,1.981 ?.32
  BottomLayer w0.229: v1(-654.068,-6.441) -653.895,-6.269 v1(-653.895,-2.431)
存储2: 3C1_11_1.1 ?.29 IC3.6 | length 81.1
  TopLayer w0.229: IC3.6 -662.026,-42.685 -661.708,-42.367 -661.708,-39.921 -661.109,-39.322 -659.74,-39.322 -658.84,-40.221 -658.84,-43.497 -658.533,-43.805 -656.049,-43.805 -655.686,-43.442 -655.686,-5.324 -655.277,-4.915 v1(-655.277,-4.206) ; v1(-655.305,-2.276) -656.209,-1.372 -656.209,2.085 -654.813,3.481 ?.29
  BottomLayer w0.229: v1(-655.305,-2.276) -655.305,-4.178 v1@-655.3,-4.183
安全带: 
安全带2-: 
安全带-: 
安全带-1: 
安全带--: 
安全带进单片机: ?.34 | length 29.3
  TopLayer w0.229: v1(-647.327,-2.088) -644.258,0.981 ?.34
  BottomLayer w0.229: -656.844,10.033 -656.971,9.906 -656.971,6.52 -655.983,5.532 -654.947,5.532 v1(-647.327,-2.088)
安全气囊-: 
安全气囊--: 
小计: 
小计清0: 
左转-OUT: ?.39 | length 42.2
  TopLayer w0.229: v1(-667.413,9.164) -660.392,9.164 v1(-659.414,8.186) ; v1(-647.936,-4.62) -643.412,-4.62 -640.311,-1.519 ?.39
  BottomLayer w0.229: -670.453,9.164 v1(-667.413,9.164) ; v1(-659.414,8.186) -659.414,8.153 -647.936,-3.325 v1(-647.936,-4.62)
左转向+: 
控制电: 
方向盘-OUT: 
显示模块电源: 
气囊-: 
水报警: 
水温: 
水温报警: ?.97AD
油报警: 
燃油: 
燃油报警: 
电机温度: 
电源监测: 
白昼灯+: 
系统故障: 
"编程 1": 3C1_8_1.2 3C1_9_1.1 ?.50 J1_1_1_1.2 | length 89.3
  TopLayer w0.229: -678.569,-43.238 -678.569,-44.93 -677.692,-45.806 -655.49,-45.806 -652.996,-43.312 v1(-652.996,-20.569) ; -678.34,-43.838 -678.34,-43.01 ; v1(-638.637,-8.463) -637.193,-7.019 ?.50
  TopLayer w0.305: -678.569,-43.238 -678.569,-43.01
  TopLayer w1.016: J1_1_1_1.2@-678.34,-41.029 3C1_8_1.2@-678.34,-38.003 ; 3C1_8_1.2@-678.305,-37.968 3C1_9_1.1
  TopLayer w1.27: -678.569,-43.01 J1_1_1_1.2
  BottomLayer w0.229: v1(-652.996,-20.569) -639.326,-20.569 -638.637,-19.881 v1(-638.637,-8.463)
"编程 2": ?.90 J1_1_1_1.3 pad.6 | length 115.3
  TopLayer w0.229: -660.377,-45.209 -655.684,-45.209 -654.091,-43.617 v2(-654.091,-31.849) ; pad.6@-643.547,-30.683 -614.129,-30.683 -613.11,-29.665 -613.11,-23.752 -615.414,-21.448 -615.414,-0.361 -615.756,-0.019 ?.90
  TopLayer w0.305: J1_1_1_1.3 -676.029,-44.237 -675.056,-45.209 -660.377,-45.209
  BottomLayer w0.762: v2@-654.035,-30.683 pad.6
  other v2: -654.075,-30.724
背光照明: ?.37 | length 23.5
  TopLayer w0.229: v1(-643.072,-2.207) -642.671,-2.207 -640.983,-0.519 ?.37
  BottomLayer w0.229: v1(-643.072,-2.207) -640.141,-2.207 -638.183,-0.249 -638.183,9.863
蜂鸣器公共段: 
超速报警-: 
车开进: 
车速-IN: 
车速信号输出给倒车雷达: ?.25
转速: 
远光-OUT: ?.40 | length 47.8
  TopLayer w0.229: v1(-665.564,-0.544) v1(-661.99,-0.544) ; v1(-647.959,-5.791) -643.901,-5.791 -640.128,-2.019 ?.40
  BottomLayer w0.229: -674.751,10.16 -674.751,8.644 v1(-665.564,-0.544) ; v1(-661.99,-0.544) -653.824,-0.544 -648.576,-5.791 v1(-647.959,-5.791)
长火: 
长火断电: 
门开-OUT: ?.14
门未关: 
鼠标+: ?.94AD R46_17_3.2 | length 5
  TopLayer w0.229: ?.94AD -616.737,1.981 R46_17_3.2@-615.929,2.789
鼠标-: ?.95AD R46_17_4.2 | length 6.6
  TopLayer w0.229: ?.95AD -617.769,2.481 -617.278,2.972 -617.278,4.501 R46_17_4.2@-616.125,5.654
"": 
pads on no net: 2.0 2.13 4275_1.0 ?.1 ?.2 ?.23 ?.24 ?.63 ?.64 ?.65 ?.66 ?.67 ?.68 ?.74 ?.75 ?.77 ?.78 ?.79 ?.82

## Polygon pours and split planes (outlines as drawn)
GND on TopLayer "TopLayer-GND" (hatched 90Degree grid 0.203 track 0.203, remove dead copper, pour order 1000): -701.97,18.555 -599.28,18.555 -599.28,-56.068 -701.97,-56.068
GND on BottomLayer "BottomLayer-GND" (hatched 90Degree grid 0.203 track 0.203, remove dead copper, pour order 1001): -699.618,17.041 -601.8,17.041 -601.8,-52.37 -700.121,-52.37
no net on InternalPlane1 (split plane): -605.313,-51.097 -696.902,-51.097 -696.902,14.087 -605.313,14.087
no net on InternalPlane2 (split plane): -605.313,-51.097 -696.902,-51.097 -696.902,14.087 -605.313,14.087
no net on InternalPlane3 (split plane): -605.313,-51.097 -696.902,-51.097 -696.902,14.087 -605.313,14.087
no net on InternalPlane4 (split plane): -605.313,-51.097 -696.902,-51.097 -696.902,14.087 -605.313,14.087
no net on InternalPlane5 (split plane): -605.313,-51.097 -696.902,-51.097 -696.902,14.087 -605.313,14.087
no net on InternalPlane6 (split plane): -605.313,-51.097 -696.902,-51.097 -696.902,14.087 -605.313,14.087
no net on InternalPlane7 (split plane): -605.313,-51.097 -696.902,-51.097 -696.902,14.087 -605.313,14.087
no net on InternalPlane8 (split plane): -605.313,-51.097 -696.902,-51.097 -696.902,14.087 -605.313,14.087
no net on InternalPlane9 (split plane): -605.313,-51.097 -696.902,-51.097 -696.902,14.087 -605.313,14.087
no net on InternalPlane10 (split plane): -605.313,-51.097 -696.902,-51.097 -696.902,14.087 -605.313,14.087
no net on InternalPlane11 (split plane): -605.313,-51.097 -696.902,-51.097 -696.902,14.087 -605.313,14.087
no net on InternalPlane12 (split plane): -605.313,-51.097 -696.902,-51.097 -696.902,14.087 -605.313,14.087
no net on InternalPlane13 (split plane): -605.313,-51.097 -696.902,-51.097 -696.902,14.087 -605.313,14.087
no net on InternalPlane14 (split plane): -605.313,-51.097 -696.902,-51.097 -696.902,14.087 -605.313,14.087
no net on InternalPlane15 (split plane): -605.313,-51.097 -696.902,-51.097 -696.902,14.087 -605.313,14.087
no net on InternalPlane16 (split plane): -605.313,-51.097 -696.902,-51.097 -696.902,14.087 -605.313,14.087

## Keep-outs
KeepOutLayer:
  lines w0.127: -697.349,-47.475 -697.349,12.202 ; -697.349,-45.964 -697.349,-50.439 -696.244,-51.544 -693.28,-51.544 -606.24,-51.544 -605.074,-50.378 -605.074,13.345 -606.262,14.534 -694.174,14.534 -695.018,14.534 ; -697.349,11.595 -697.349,13.492 -696.308,14.534 -694.794,14.534

## Other copper
TopLayer:
  rectangle net GND: -633.816,-6.369 -623.199,4.045
  rectangle net VCC: -614.284,-0.63 -611.708,0.981
  rectangle net VCC: -609.963,-0.869 -606.473,1.011
  rectangle net "16M 2": -622.257,-18.176 -620.111,-16.027
  rectangle net GND: -674.35,-42.118 -672.399,-39.708
  rectangle net "编程 2": -676.88,-42.146 -675.165,-39.721
  rectangle net "编程 1": -679.409,-42.052 -677.748,-39.616
  rectangle net VCC: -682.307,-42.118 -680.016,-39.588
  rectangle net VCC: -656.151,6.005 -653.659,8.364
  rectangle net GND: -651.802,6.347 -649.694,8.146
  rectangle net GND: -610.105,7.861 -608.391,10.142
  rectangle net GND: -624.794,-9.482 -624.286,-8.067
  rectangle net "编程 2": -654.639,-32.398 -653.529,-30.119
  rectangle net GND: -688.19,-12.451 -683.115,-7.483
  rectangle net CAN_L: -672.991,-13.985 -668.284,-10.389
  rectangle net SPLIT: -672.541,-32.964 -662.31,-30.084
BottomLayer:
  rectangle net VCC: -610.009,-0.856 -606.539,1.011
  rectangle net VCC: -614.403,-0.378 -611.434,1.115
  rectangle net GND: -688.561,-12.24 -683.062,-7.455
  rectangle net GND: -632.901,-4.76 -624.468,3.066
  rectangle net X1-2: -608.645,-3.873 -605.726,-1.199
  rectangle net X1-4: -608.569,-8.24 -605.65,-5.565
  rectangle net X1-5: -608.513,-12.499 -605.594,-9.825
  rectangle net X1-3: -608.546,-16.794 -605.627,-14.12
  rectangle net OIL_ZERO_OIL: -612.097,9.495 -609.178,12.169
  rectangle net 制动器处: -616.168,9.324 -613.25,11.999
  rectangle net OIL_SIN+: -620.174,9.296 -617.256,11.971
  rectangle net OIL_COS-: -624.675,9.274 -621.756,11.948
  rectangle net ZHS_COS-: -630.342,9.187 -627.423,11.862
  rectangle net ZHS_SIN+: -635.881,9.149 -632.963,11.824
  rectangle net 背光照明: -639.516,9.154 -636.598,11.829
  rectangle net 前雾-OUT: -643.74,9.126 -640.822,11.801
  rectangle net 位置灯: -647.878,9.144 -644.959,11.819
  rectangle net ABS-: -652.508,9.141 -649.59,11.816
  rectangle net X1-1: -608.477,-20.925 -605.559,-18.25
  rectangle net 安全带进单片机: -657.906,9.053 -654.987,11.727
  rectangle net FMQ+: -662.12,9.03 -659.201,11.704
  rectangle net FMQ-1: -666.471,9.032 -663.552,11.707
  rectangle net 左转-OUT: -672.153,8.959 -669.234,11.633
  rectangle net 远光-OUT: -676.364,8.931 -673.445,11.605

## Silkscreen, mask and mechanical layers (free items; w line width, h text height)
TopOverlay:
  lines w0.762: -696.506,-6.152 -684.827,-6.152 ; -696.448,-21.572 -684.743,-21.572
  text "T19CAN20180910" at -683.387,10.795 h1.8
  text "CAN-L" at -694.388,7.963 h1.52
  text "CAN-H" at -694.357,0.861 h1.52
  text "GND" at -694.322,-11.699 h1.52 r90
  text "13.5V" at -694.154,-20.858 h1.52 r90
  text "SB-" at -696.801,-27.602 h1.52
  text "SB+" at -696.633,-38.758 h1.52
BottomOverlay:
  lines w0.102: -610.441,1.247 -610.441,8.755 -607.924,8.755 -607.901,8.732 -607.901,3.787 -607.901,1.247
  lines w0.762: -696.653,-6.142 -684.837,-6.142 ; -696.399,-21.656 -684.616,-21.656
  text "CAN-L" at -694.469,8.072 h1.52
  text "CAN-H" at -694.367,0.904 h1.52
  text "GND" at -694.406,-11.74 h1.52 r90
  text "13.5V" at -694.07,-20.858 h1.52 r90
  text "SB-" at -696.737,-27.559 h1.52
  text "SB+" at -696.633,-38.694 h1.52
BottomSolder:
  rectangle: -608.642,-3.871 -605.729,-1.201
  rectangle: -608.566,-8.237 -605.653,-5.568
  rectangle: -608.505,-12.497 -605.597,-9.832
  rectangle: -608.543,-16.792 -605.638,-14.13
  rectangle: -612.094,9.497 -609.181,12.167
  rectangle: -616.163,9.327 -613.253,11.994
  rectangle: -620.171,9.299 -617.258,11.968
  rectangle: -624.644,9.289 -621.759,11.946
  rectangle: -630.339,9.19 -627.426,11.859
  rectangle: -635.879,9.152 -632.965,11.821
  rectangle: -639.514,9.157 -636.6,11.826
  rectangle: -643.738,9.129 -640.824,11.798
  rectangle: -647.875,9.147 -644.962,11.816
  rectangle: -652.506,9.144 -649.592,11.816
  rectangle: -608.475,-20.922 -605.561,-18.252
  rectangle: -657.878,9.073 -655.008,11.704
  rectangle: -662.107,9.035 -659.206,11.687
  rectangle: -666.463,9.035 -663.555,11.699
  rectangle: -672.15,8.961 -669.237,11.631
  rectangle: -676.351,8.936 -673.453,11.595